# Allegro board RV1126_RV1109_Template_LP3S178P132SD6_V10_20200901.brd
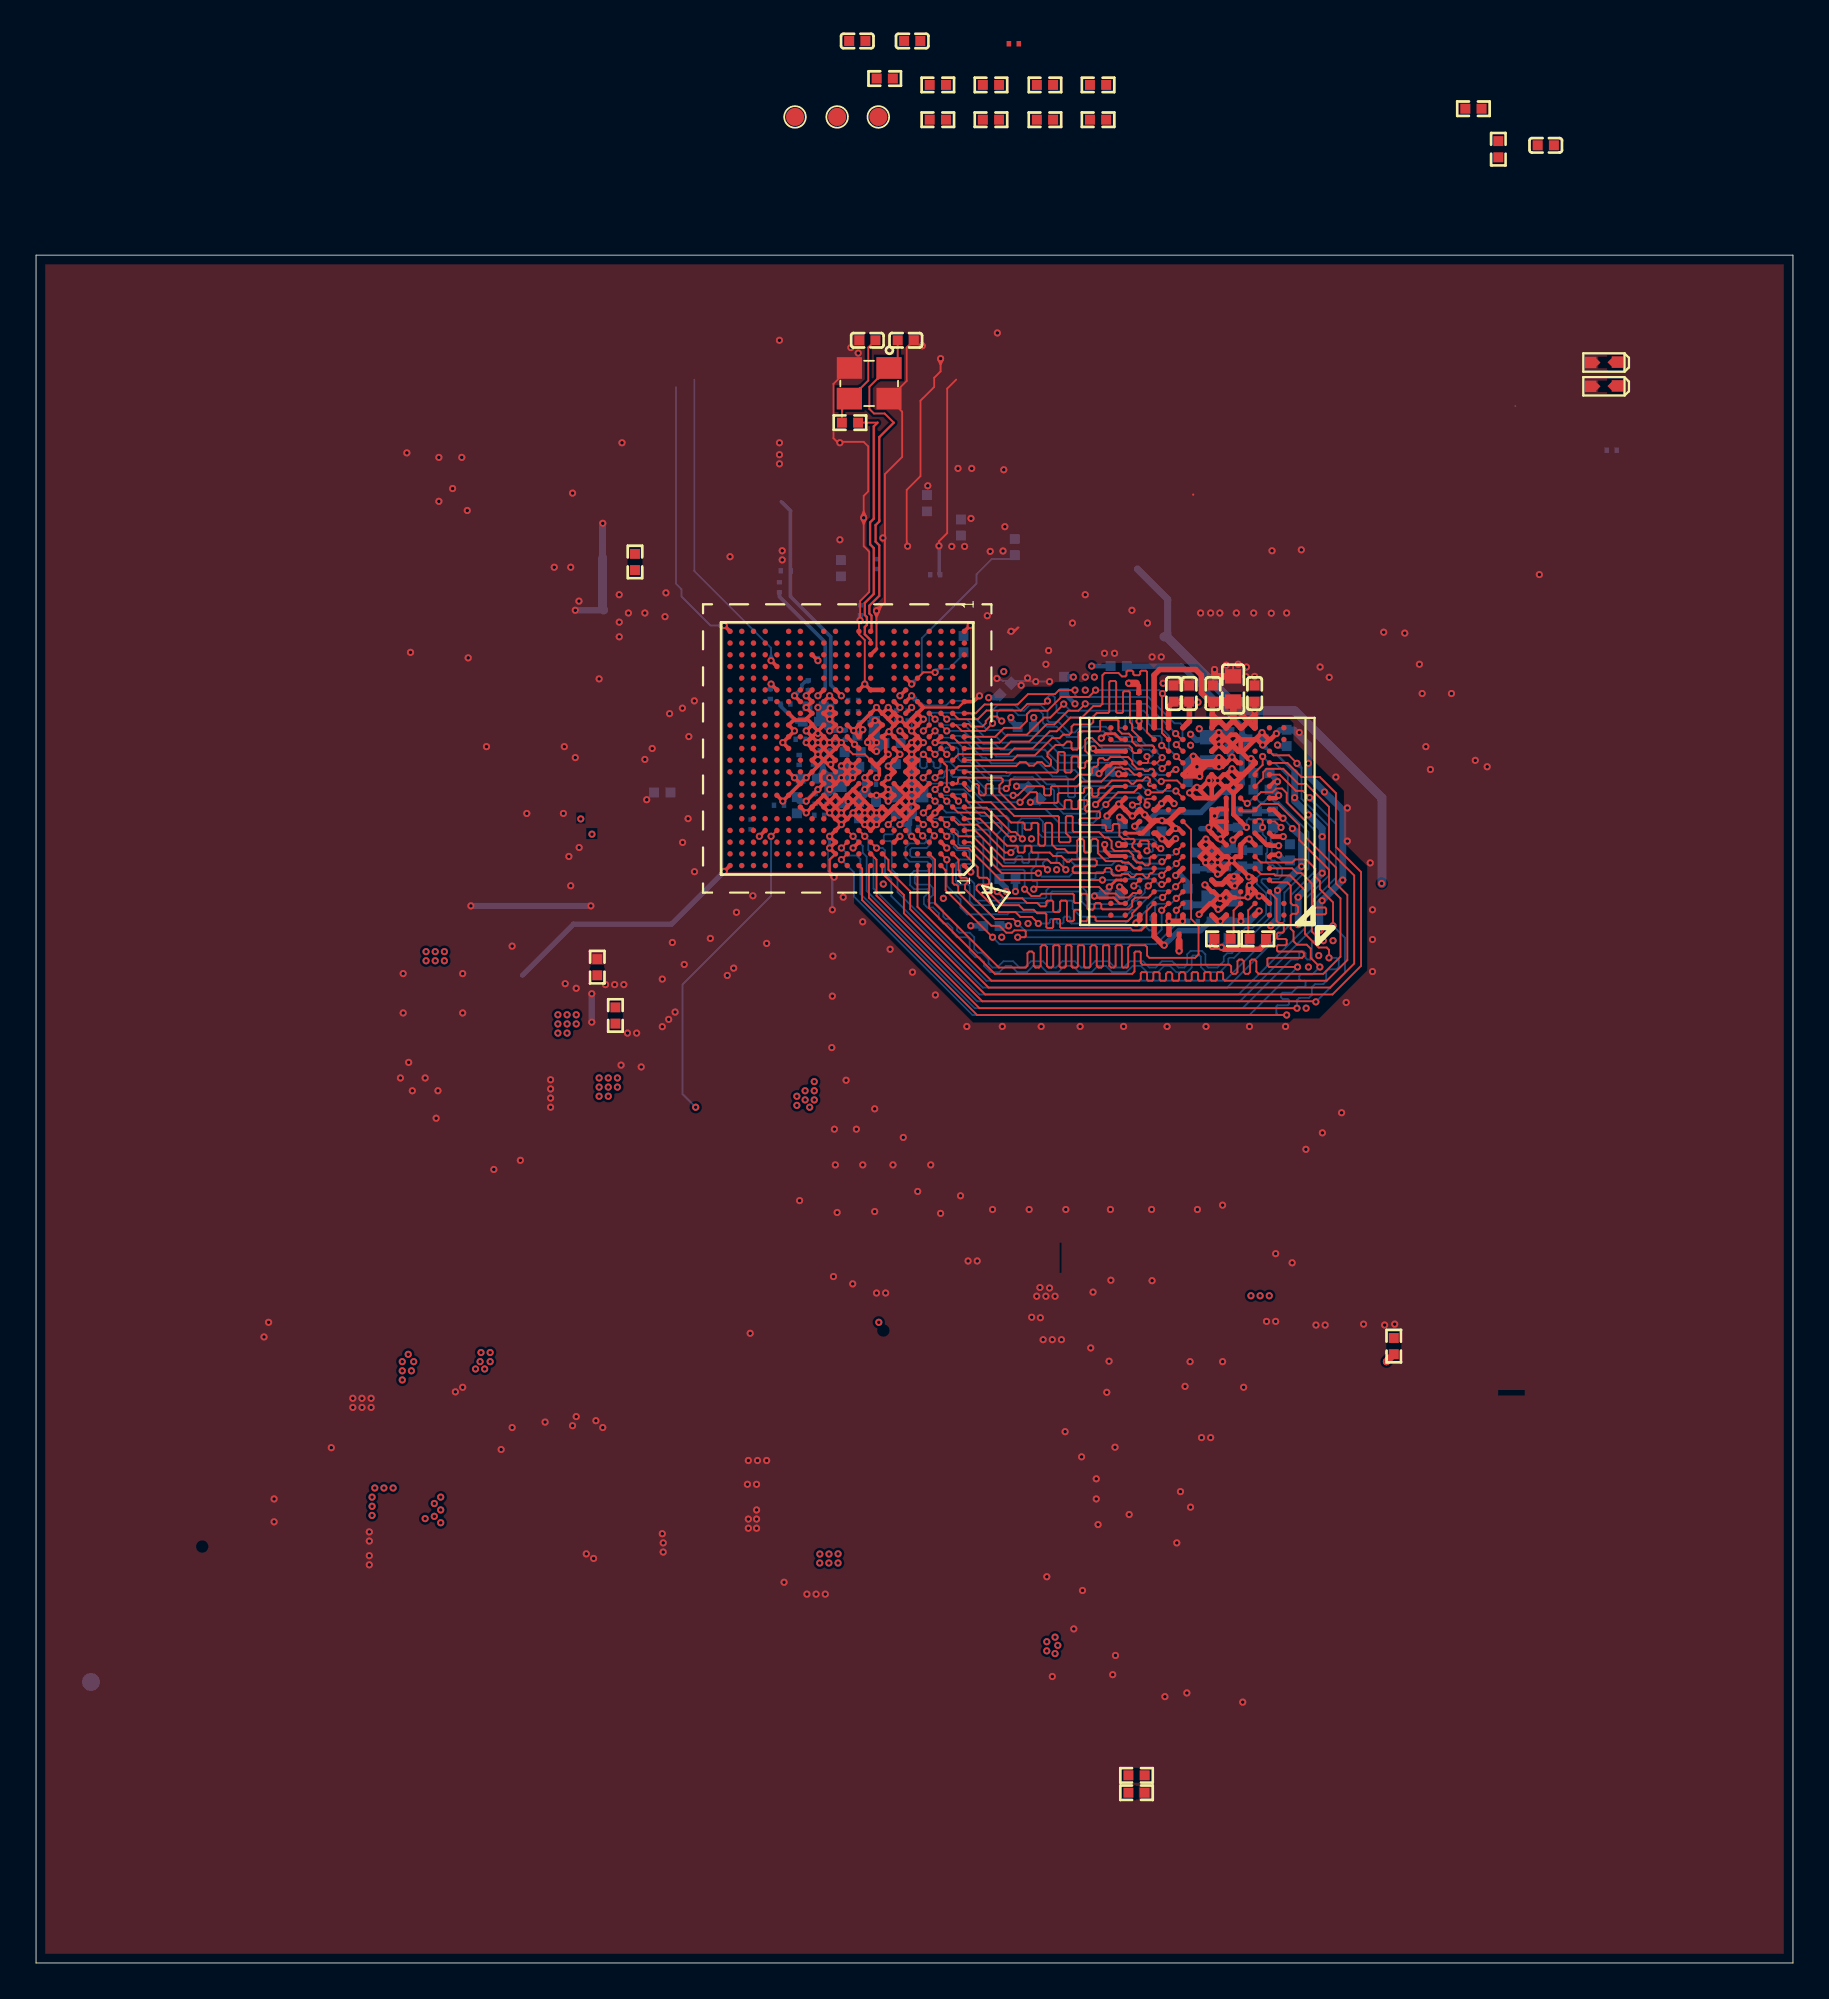
[diagram p0: board, top side]
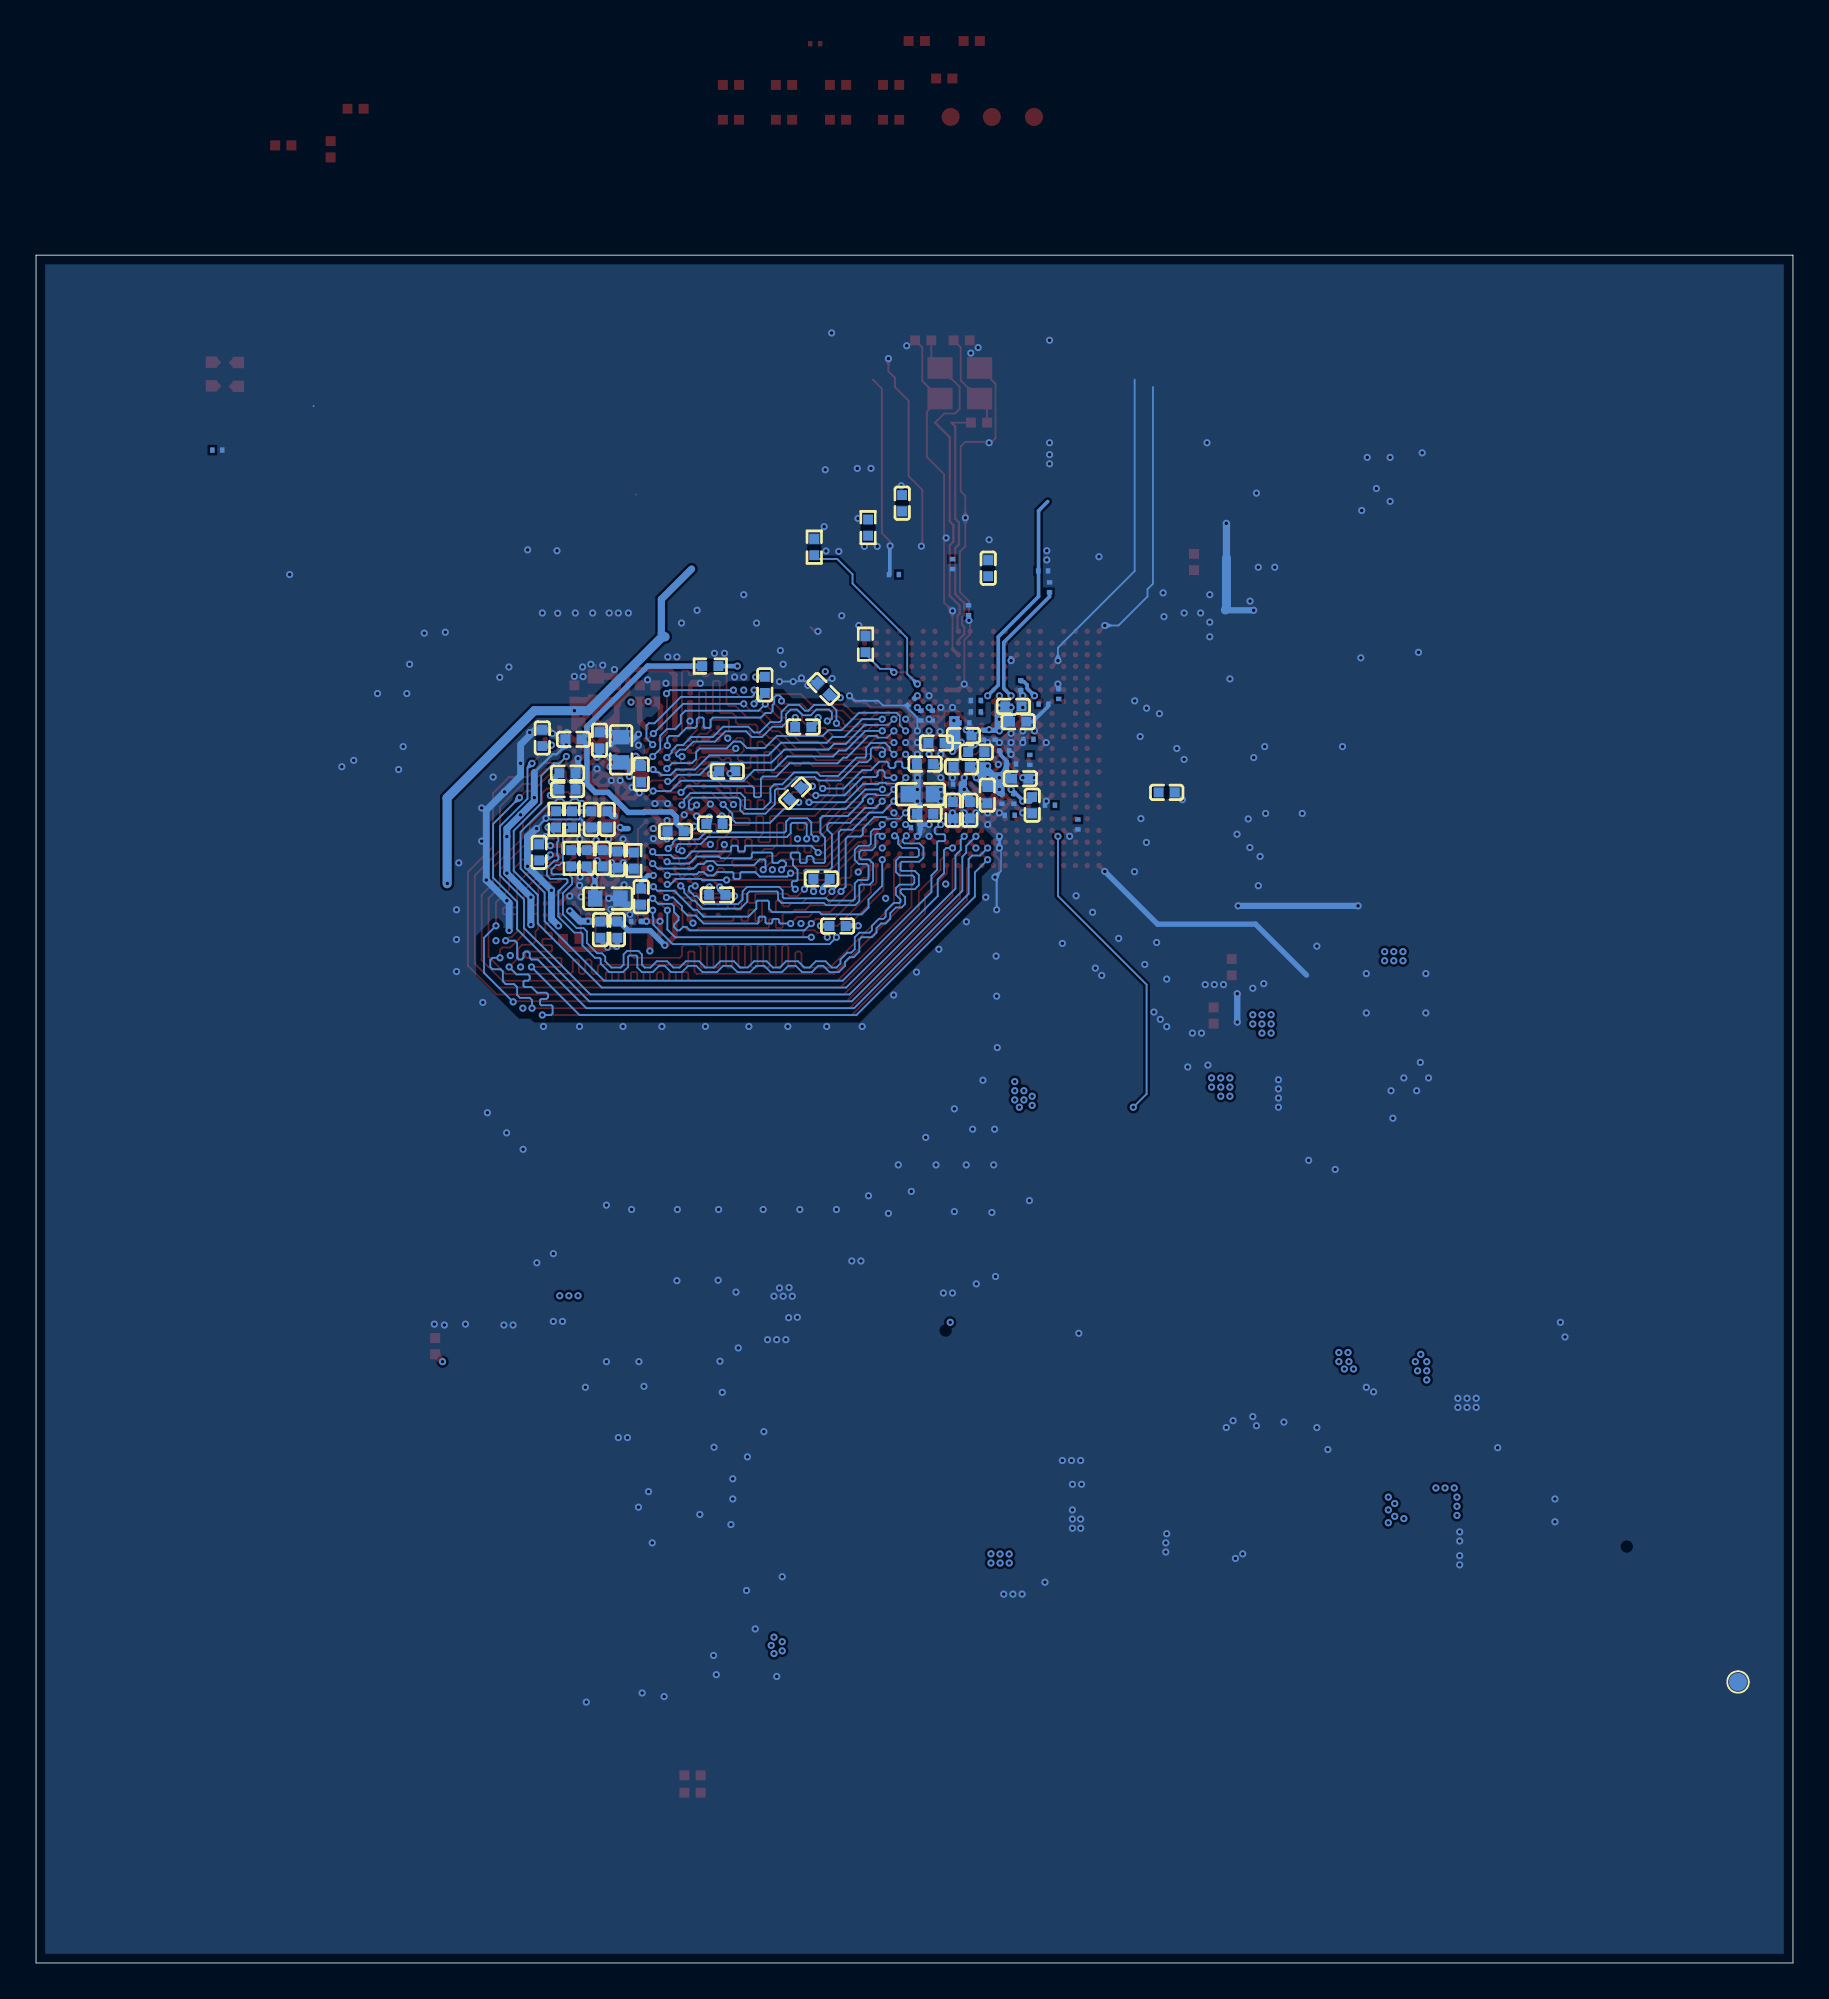
[diagram p1: board, bottom side, seen from below]

Outline 97.49 x 94.79 mm; copper layers: TOP, GND, POWER, S1, GND2, BOTTOM. Coordinates in mm from the lower left corner of the outline.
Outline path: 0,94.79 97.49,94.79 97.49,0 0,0 0,94.79

## Placement (name value [footprint] x y rotation side)
C1000  .10  [C0402]  34.75 64.97 180 bottom
C1001  .10  [C0201]  43.89 64.62 270 bottom
C1002  .10  [C0201]  43.38 66.55 180 bottom
C1003  .10  [C0201]  43.76 67.28 180 bottom
C1004  .10  [C0402]  46.13 66.4 0 bottom
C1005  .10  [C0402]  44.7 64.82 270 bottom
C1006  .10  [C0402]  42.88 65.74 180 bottom
C1007  .10  [C0201]  43.23 64.62 270 bottom
C1008  .10  [C0201]  46.33 65.43 0 bottom
C1009  .10  [C0402]  45.67 63.98 270 bottom
C1010  .10  [C0402]  45.31 67.21 180 bottom
C1011  .10  [C0402]  42.21 64.26 270 bottom
C1012  .10  [C0201]  44.91 68.17 270 bottom
C1013  .10  [C0201]  44.27 68.17 270 bottom
C1014  .10  [C0402]  42.99 68.89 180 bottom
C1015  .10  [C0402]  43.26 69.75 180 bottom
C1016  .10  [C0201]  45.97 68.83 180 bottom
C1017  .10  [C0201]  45.34 69.44 0 bottom
C1018  .10  [C0402]  47.52 67.72 0 bottom
C1019  .10  [C0402]  46.02 68.12 180 bottom
C1100  .10  [C0402]  46.13 90.07 180 top
C1101  .10  [C0402]  48.26 90.07 180 top
C1102  .10  [C0402]  48.62 106.68 0 top
C1103  .10  [C0201]  54.25 106.53 0 top
C1104  .10  [C0201]  46.63 77.65 90 bottom
C1105  .10  [C0402]  49.43 81.03 90 bottom
C1106  .10  [C0402]  45.57 106.68 0 top
C1107  .10  [C0201]  45.75 75.08 270 bottom
C1108  .10  [C0201]  49.89 77.06 0 bottom
C1200  .10  [C0201]  63.14 57.1 0 top
C1201  .10  [C0201]  64.19 57.81 0 bottom
C1202  .10  [C0201]  61.19 70.23 90 top
C1203  .10  [C0402]  46.61 63.98 270 bottom
C1204  .10  [C0402]  48.16 63.78 0 bottom
C1205  .10  [C0402]  48.16 66.55 0 bottom
C1206  .10  [C0603]  48.41 64.87 0 bottom
C1300  .10  [C0201]  41.25 76.35 90 bottom
C1301  .10  [C0201]  48.39 69.24 270 bottom
C1302  .10  [C0201]  43.46 63.7 0 bottom
C1400  .10  [C0201]  87.43 83.97 180 bottom
C1401  .10  [C0201]  47.75 69.24 270 bottom
C1402  .10  [C0201]  48.92 70 315 bottom
C1500  .10  [C0402]  44.65 77.42 90 bottom
C1501  .10  [C0201]  45.34 70.08 0 bottom
C1502  .10  [C0402]  83.77 100.89 180 top
C1600  .10  [C0201]  41.58 69.88 180 bottom
C1601  .10  [C0201]  42.42 67.92 0 bottom
C1602  .10  [C0201]  40.74 70.43 90 bottom
C1603  .10  [C0201]  42.85 70.92 270 bottom
C1700  .10  [C0201]  39.67 63.2 270 bottom
C1701  .10  [C0201]  41.22 64.26 0 bottom
C1702  .10  [C0201]  42.34 66.78 270 bottom
C1800  .10  [C0201]  41.61 77.27 180 bottom
C3101  .10  [C0603]  65.02 67.34 90 bottom
C3102  .10  [C0402]  55.37 64.92 135 bottom
C3103  .10  [C0402]  59.84 63.22 0 bottom
C3104  .10  [C0402]  66.22 67.87 90 bottom
C3105  .10  [C0402]  63.91 59.18 270 bottom
C3106  .10  [C0402]  68 65.13 180 bottom
C3107  .10  [C0402]  53.9 60.17 180 bottom
C3108  .10  [C0402]  53.01 57.56 180 bottom
C3109  .10  [C0603]  66.42 70.71 90 top
C3110  .10  [C0402]  65.3 70.46 90 top
C3111  .10  [C0402]  67.61 70.46 90 top
C3112  .10  [C0402]  65.23 57.35 270 bottom
C3113  .10  [C0402]  66.17 57.35 270 bottom
C3114  .10  [C0402]  66.93 61.32 90 bottom
C3116  .10  [C0402]  66.04 61.32 270 bottom
C3117  .10  [C0402]  65.23 61.24 270 bottom
C3118  .10  [C0402]  62 62.81 0 bottom
C3119  .10  [C0402]  67.67 67.92 0 bottom
C3120  .10  [C0603]  65.76 59.08 180 bottom
C3121  .10  [C0402]  63.91 65.99 270 bottom
C3122  .10  [C0402]  59.69 59.28 180 bottom
C3123  .10  [C0402]  63.98 70.46 90 top
C3124  .10  [C0402]  65.79 63.47 270 bottom
C3125  .10  [C0402]  69.39 68 90 bottom
C3126  .10  [C0402]  68 66.04 180 bottom
C3127  .10  [C0402]  63.12 70.46 90 top
C3128  .10  [C0402]  57.05 70.94 270 bottom
C3129  .10  [C0402]  53.8 70.71 45 bottom
C3130  .10  [C0402]  59.13 66.14 180 bottom
C3131  .10  [C0402]  54.91 68.61 180 bottom
C3132  .10  [C0402]  69.57 61.65 90 bottom
C3898  .10  [C0402]  66.67 63.47 270 bottom
D1700  .10  [ESD0402]  86.99 87.51 180 top
D1701  .10  [ESD0402]  86.99 88.83 180 top
R1100  .10  [R0402]  45.16 85.5 180 top
R1103  .10  [R0402]  50.04 102.31 0 top
R1104  .10  [R0402]  51.32 79.67 90 bottom
R1200  .10  [R0201]  48.67 63.02 180 bottom
R1300  .10  [R0402]  50.04 104.24 0 top
R1301  .10  [R0402]  75.34 34.24 270 top
R1304  .10  [R0402]  61.06 10.41 0 top
R1305  .10  [R0402]  61.06 9.45 0 top
R1400  .10  [R0402]  54.31 78.59 90 bottom
R1401  .10  [R0402]  51.46 73.2 90 bottom
R1500  .10  [R0402]  52.98 102.31 0 top
R1501  .10  [R0402]  31.14 55.27 270 top
R1503  .10  [R0402]  32.15 52.59 270 top
R1600  .10  [R0402]  81.14 100.67 90 top
R1601  .10  [R0402]  79.76 102.92 180 top
R1602  .10  [R0402]  33.23 77.76 90 top
R1603  .10  [R0402]  52.98 104.24 0 top
R1700  .10  [R0402]  55.98 102.31 0 top
R1702  .10  [R0402]  55.98 104.24 0 top
R1706  .10  [R0402]  58.93 102.31 0 top
R1707  .10  [R0402]  58.93 104.24 0 top
R3100  .10  [R0402]  67.79 56.85 0 top
R3101  .10  [R0402]  65.84 56.85 180 top
R3102  .10  [R0402]  67.74 63.47 90 bottom
R3103  .10  [R0402]  68.63 63.47 90 bottom
R3104  .10  [R0402]  67.79 61.32 90 bottom
R3106  .10  [R0402]  64.31 61.19 270 bottom
R3108  .10  [R0402]  60.07 71.98 0 bottom
R3109  .10  [R0402]  47.09 104.6 0 top
TP1000  VAL  [TP_1R00]  42.11 102.46 0 top
TP1700  VAL  [TP_1R00]  44.45 102.46 0 top
TP1701  VAL  [TP_1R00]  46.74 102.46 0 top
TP1702  VAL  [TP_1R00]  3.05 15.6 180 bottom
U1000  VAL  [BGA409_14R00X14R00X0R90]  45.01 67.41 90 top
U3100  VAL  [FBGA178_13R00X11R50X1R20]  64.44 63.36 180 top
Y1100  VAL  [CRY4_3R20X2R50X0R80]  46.23 87.68 180 top

## Library data of the parts
C1000 C1004-C1006 C1009-C1011 C1014 C1015 C1018 C1019 C1100-C1102 C1105 C1106 C1203-C1205 C1500 C1502 C3102-C3108 C3110-C3114 C3116-C3119 C3121-C3132 C3898 = C0402
C1001-C1003 C1007 C1008 C1012 C1013 C1016 C1017 C1103 C1104 C1107 C1108 C1200-C1202 C1300-C1302 C1400-C1402 C1501 C1600-C1603 C1700-C1702 C1800 = C0201
C1206 C3101 C3109 C3120 = C0603
D1700 D1701 = ESD0402
R1100 R1103 R1104 R1300 R1301 R1304 R1305 R1400 R1401 R1500 R1501 R1503 R1600-R1603 R1700 R1702 R1706 R1707 R3100-R3104 R3106 R3108 R3109 = R0402
R1200 = R0201
TP1000 TP1700-TP1702 = TP_1R00
U1000 = BGA409_14R00X14R00X0R90
U3100 = FBGA178_13R00X11R50X1R20
Y1100 = CRY4_3R20X2R50X0R80

## Footprints (pads in the part's own frame, mm; a bottom-side part is the same pattern mirrored in y, then rotated)
BGA409_14R00X14R00X0R90
  round 0.3 smd: A1(-6.5,-6.5) A2(-6.5,-5.85) A3(-6.5,-5.2) A4(-6.5,-4.55) A5(-6.5,-3.9) A6(-6.5,-3.25) A7(-6.5,-2.6) A8(-6.5,-1.95) A9(-6.5,-1.3) A10(-6.5,-0.65) A11(-6.5,0) A12(-6.5,0.65) A13(-6.5,1.3) A15(-6.5,2.6) A16(-6.5,3.25) A18(-6.5,4.55) A19(-6.5,5.2) A20(-6.5,5.85) A21(-6.5,6.5) AA1(6.5,-6.5) AA2(6.5,-5.85) AA3(6.5,-5.2) AA4(6.5,-4.55) AA6(6.5,-3.25) AA7(6.5,-2.6) AA9(6.5,-1.3) AA10(6.5,-0.65) AA12(6.5,0.65) AA13(6.5,1.3) AA15(6.5,2.6) AA16(6.5,3.25) AA18(6.5,4.55) AA19(6.5,5.2) AA20(6.5,5.85) AA21(6.5,6.5) B1(-5.85,-6.5) B2(-5.85,-5.85) B3(-5.85,-5.2) B4(-5.85,-4.55) B5(-5.85,-3.9) B6(-5.85,-3.25) B7(-5.85,-2.6) B8(-5.85,-1.95) B9(-5.85,-1.3) B10(-5.85,-0.65) B11(-5.85,0) B12(-5.85,0.65) B13(-5.85,1.3) B14(-5.85,1.95) B15(-5.85,2.6) B16(-5.85,3.25) B17(-5.85,3.9) B18(-5.85,4.55) B19(-5.85,5.2) B20(-5.85,5.85) B21(-5.85,6.5) C1(-5.2,-6.5) C2(-5.2,-5.85) C3(-5.2,-5.2) C4(-5.2,-4.55) C5(-5.2,-3.9) C6(-5.2,-3.25) C7(-5.2,-2.6) C8(-5.2,-1.95) C9(-5.2,-1.3) C10(-5.2,-0.65) C11(-5.2,0) C12(-5.2,0.65) C13(-5.2,1.3) C14(-5.2,1.95) C15(-5.2,2.6) C16(-5.2,3.25) C17(-5.2,3.9) C18(-5.2,4.55) C19(-5.2,5.2) C20(-5.2,5.85) C21(-5.2,6.5) D1(-4.55,-6.5) D2(-4.55,-5.85) D3(-4.55,-5.2) D4(-4.55,-4.55) D5(-4.55,-3.9) D6(-4.55,-3.25) D7(-4.55,-2.6) D8(-4.55,-1.95) D9(-4.55,-1.3) D10(-4.55,-0.65) D11(-4.55,0) D12(-4.55,0.65) D13(-4.55,1.3) D14(-4.55,1.95) D15(-4.55,2.6) D16(-4.55,3.25) D17(-4.55,3.9) D18(-4.55,4.55) D19(-4.55,5.2) D20(-4.55,5.85) D21(-4.55,6.5) E1(-3.9,-6.5) E2(-3.9,-5.85) E3(-3.9,-5.2) E4(-3.9,-4.55) E5(-3.9,-3.9) E6(-3.9,-3.25) E7(-3.9,-2.6) E8(-3.9,-1.95) E9(-3.9,-1.3) E10(-3.9,-0.65) E11(-3.9,0) E12(-3.9,0.65) E13(-3.9,1.3) E14(-3.9,1.95) E16(-3.9,3.25) E17(-3.9,3.9) E18(-3.9,4.55) E19(-3.9,5.2) E20(-3.9,5.85) F1(-3.25,-6.5) F2(-3.25,-5.85) F3(-3.25,-5.2) F4(-3.25,-4.55) F5(-3.25,-3.9) F6(-3.25,-3.25) F7(-3.25,-2.6) F8(-3.25,-1.95) F9(-3.25,-1.3) F10(-3.25,-0.65) F11(-3.25,0) F12(-3.25,0.65) F13(-3.25,1.3) F14(-3.25,1.95) F15(-3.25,2.6) F19(-3.25,5.2) F20(-3.25,5.85) F21(-3.25,6.5) G1(-2.6,-6.5) G2(-2.6,-5.85) G3(-2.6,-5.2) G4(-2.6,-4.55) G5(-2.6,-3.9) G6(-2.6,-3.25) G7(-2.6,-2.6) G8(-2.6,-1.95) G9(-2.6,-1.3) G10(-2.6,-0.65) G11(-2.6,0) G12(-2.6,0.65) G13(-2.6,1.3) G15(-2.6,2.6) G16(-2.6,3.25) G17(-2.6,3.9) G18(-2.6,4.55) G19(-2.6,5.2) G20(-2.6,5.85) G21(-2.6,6.5) H1(-1.95,-6.5) H2(-1.95,-5.85) H3(-1.95,-5.2) H4(-1.95,-4.55) H5(-1.95,-3.9) H6(-1.95,-3.25) H7(-1.95,-2.6) H8(-1.95,-1.95) H9(-1.95,-1.3) H10(-1.95,-0.65) H11(-1.95,0) H12(-1.95,0.65) H13(-1.95,1.3) H14(-1.95,1.95) H15(-1.95,2.6) H16(-1.95,3.25) H17(-1.95,3.9) H18(-1.95,4.55) H19(-1.95,5.2) H20(-1.95,5.85) J1(-1.3,-6.5) J2(-1.3,-5.85) J3(-1.3,-5.2) J4(-1.3,-4.55) J5(-1.3,-3.9) J6(-1.3,-3.25) J7(-1.3,-2.6) J9(-1.3,-1.3) J10(-1.3,-0.65) J11(-1.3,0) J12(-1.3,0.65) J13(-1.3,1.3) J14(-1.3,1.95) J15(-1.3,2.6) J16(-1.3,3.25) J17(-1.3,3.9) J18(-1.3,4.55) J19(-1.3,5.2) J20(-1.3,5.85) J21(-1.3,6.5) K1(-0.65,-6.5) K2(-0.65,-5.85) K3(-0.65,-5.2) K4(-0.65,-4.55) K5(-0.65,-3.9) K6(-0.65,-3.25) K7(-0.65,-2.6) K8(-0.65,-1.95) K9(-0.65,-1.3) K10(-0.65,-0.65) K11(-0.65,0) K12(-0.65,0.65) K13(-0.65,1.3) K14(-0.65,1.95) K15(-0.65,2.6) K16(-0.65,3.25) K17(-0.65,3.9) K18(-0.65,4.55) K19(-0.65,5.2) K20(-0.65,5.85) K21(-0.65,6.5) L1(0,-6.5) L2(0,-5.85) L3(0,-5.2) L4(0,-4.55) L5(0,-3.9) L6(0,-3.25) L7(0,-2.6) L9(0,-1.3) L10(0,-0.65) L11(0,0) L12(0,0.65) L13(0,1.3) L14(0,1.95) L16(0,3.25) L17(0,3.9) L19(0,5.2) L20(0,5.85) M1(0.65,-6.5) M2(0.65,-5.85) M3(0.65,-5.2) M4(0.65,-4.55) M5(0.65,-3.9) M6(0.65,-3.25) M7(0.65,-2.6) M8(0.65,-1.95) M9(0.65,-1.3) M10(0.65,-0.65) M11(0.65,0) M12(0.65,0.65) M13(0.65,1.3) M14(0.65,1.95) M15(0.65,2.6) M16(0.65,3.25) M17(0.65,3.9) M18(0.65,4.55) M19(0.65,5.2) M20(0.65,5.85) M21(0.65,6.5) N1(1.3,-6.5) N2(1.3,-5.85) N3(1.3,-5.2) N4(1.3,-4.55) N5(1.3,-3.9) N6(1.3,-3.25) N7(1.3,-2.6) N8(1.3,-1.95) N9(1.3,-1.3) N10(1.3,-0.65) N11(1.3,0) N12(1.3,0.65) N13(1.3,1.3) N14(1.3,1.95) N16(1.3,3.25) N17(1.3,3.9) N18(1.3,4.55) N19(1.3,5.2) N20(1.3,5.85) N21(1.3,6.5) P1(1.95,-6.5) P2(1.95,-5.85) P3(1.95,-5.2) P4(1.95,-4.55) P5(1.95,-3.9) P6(1.95,-3.25) P7(1.95,-2.6) P8(1.95,-1.95) P9(1.95,-1.3) P10(1.95,-0.65) P11(1.95,0) P12(1.95,0.65) P13(1.95,1.3) P14(1.95,1.95) P15(1.95,2.6) P16(1.95,3.25) P17(1.95,3.9) P19(1.95,5.2) P20(1.95,5.85) R1(2.6,-6.5) R2(2.6,-5.85) R3(2.6,-5.2) R4(2.6,-4.55) R5(2.6,-3.9) R6(2.6,-3.25) R7(2.6,-2.6) R8(2.6,-1.95) R9(2.6,-1.3) R10(2.6,-0.65) R11(2.6,0) R12(2.6,0.65) R13(2.6,1.3) R14(2.6,1.95) R15(2.6,2.6) R16(2.6,3.25) R17(2.6,3.9) R18(2.6,4.55) R19(2.6,5.2) R20(2.6,5.85) R21(2.6,6.5) T1(3.25,-6.5) T2(3.25,-5.85) T3(3.25,-5.2) T4(3.25,-4.55) T6(3.25,-3.25) T7(3.25,-2.6) T8(3.25,-1.95) T9(3.25,-1.3) T10(3.25,-0.65) T11(3.25,0) T12(3.25,0.65) T13(3.25,1.3) T14(3.25,1.95) T15(3.25,2.6) T16(3.25,3.25) T17(3.25,3.9) T18(3.25,4.55) T19(3.25,5.2) T20(3.25,5.85) T21(3.25,6.5) U2(3.9,-5.85) U3(3.9,-5.2) U4(3.9,-4.55) U5(3.9,-3.9) U6(3.9,-3.25) U7(3.9,-2.6) U9(3.9,-1.3) U11(3.9,0) U12(3.9,0.65) U13(3.9,1.3) U15(3.9,2.6) U16(3.9,3.25) U18(3.9,4.55) U19(3.9,5.2) U20(3.9,5.85) V1(4.55,-6.5) V2(4.55,-5.85) V3(4.55,-5.2) V4(4.55,-4.55) V5(4.55,-3.9) V6(4.55,-3.25) V7(4.55,-2.6) V9(4.55,-1.3) V11(4.55,0) V12(4.55,0.65) V13(4.55,1.3) V15(4.55,2.6) V16(4.55,3.25) V17(4.55,3.9) V18(4.55,4.55) V19(4.55,5.2) V20(4.55,5.85) V21(4.55,6.5) W1(5.2,-6.5) W2(5.2,-5.85) W3(5.2,-5.2) W4(5.2,-4.55) W5(5.2,-3.9) W6(5.2,-3.25) W7(5.2,-2.6) W8(5.2,-1.95) W9(5.2,-1.3) W10(5.2,-0.65) W11(5.2,0) W12(5.2,0.65) W13(5.2,1.3) W14(5.2,1.95) W15(5.2,2.6) W16(5.2,3.25) W17(5.2,3.9) W18(5.2,4.55) W19(5.2,5.2) W20(5.2,5.85) W21(5.2,6.5) Y1(5.85,-6.5) Y2(5.85,-5.85) Y3(5.85,-5.2) Y4(5.85,-4.55) Y5(5.85,-3.9) Y6(5.85,-3.25) Y7(5.85,-2.6) Y8(5.85,-1.95) Y9(5.85,-1.3) Y10(5.85,-0.65) Y11(5.85,0) Y12(5.85,0.65) Y13(5.85,1.3) Y14(5.85,1.95) Y15(5.85,2.6) Y16(5.85,3.25) Y17(5.85,3.9) Y18(5.85,4.55) Y19(5.85,5.2) Y20(5.85,5.85) Y21(5.85,6.5)
C0201
  rect 0.25x0.3 smd: 1(-0.275,0) 2(0.275,0)
C0402
  rect 0.55x0.55 smd: 1(-0.45,0) 2(0.45,0)
C0603
  rect 0.8x0.9 smd: 1(-0.7,0) 2(0.7,0)
CRY4_3R20X2R50X0R80
  rect 1.4x1.2 smd: 1(-1.1,-0.85) 2(1.1,-0.85) 3(1.1,0.85) 4(-1.1,0.85)
ESD0402
  custom 0.868x0.636 smd: 1(-0.635,-0.02)
  custom 0.86x0.636 smd: 2(0.622,0)
FBGA178_13R00X11R50X1R20
  round 0.3 smd: A1(-4.8,5.2) A2(-4,5.2) A3(-3.2,5.2) A4(-2.4,5.2) A5(-1.6,5.2) A6(-0.8,5.2) A8(0.8,5.2) A9(1.6,5.2) A10(2.4,5.2) A11(3.2,5.2) A12(4,5.2) A13(4.8,5.2) B1(-4.8,4.55) B2(-4,4.55) B3(-3.2,4.55) B4(-2.4,4.55) B5(-1.6,4.55) B6(-0.8,4.55) B8(0.8,4.55) B9(1.6,4.55) B10(2.4,4.55) B11(3.2,4.55) B12(4,4.55) B13(4.8,4.55) C2(-4,3.9) C3(-3.2,3.9) C4(-2.4,3.9) C5(-1.6,3.9) C6(-0.8,3.9) C8(0.8,3.9) C9(1.6,3.9) C10(2.4,3.9) C11(3.2,3.9) C12(4,3.9) D2(-4,3.25) D3(-3.2,3.25) D4(-2.4,3.25) D5(-1.6,3.25) D6(-0.8,3.25) D8(0.8,3.25) D9(1.6,3.25) D10(2.4,3.25) D11(3.2,3.25) D12(4,3.25) E2(-4,2.6) E3(-3.2,2.6) E4(-2.4,2.6) E5(-1.6,2.6) E6(-0.8,2.6) E8(0.8,2.6) E9(1.6,2.6) E10(2.4,2.6) E11(3.2,2.6) E12(4,2.6) F2(-4,1.95) F3(-3.2,1.95) F4(-2.4,1.95) F5(-1.6,1.95) F6(-0.8,1.95) F8(0.8,1.95) F9(1.6,1.95) F10(2.4,1.95) F11(3.2,1.95) F12(4,1.95) G2(-4,1.3) G3(-3.2,1.3) G4(-2.4,1.3) G5(-1.6,1.3) G6(-0.8,1.3) G8(0.8,1.3) G9(1.6,1.3) G10(2.4,1.3) G11(3.2,1.3) G12(4,1.3) H2(-4,0.65) H3(-3.2,0.65) H4(-2.4,0.65) H5(-1.6,0.65) H6(-0.8,0.65) H8(0.8,0.65) H9(1.6,0.65) H10(2.4,0.65) H11(3.2,0.65) H12(4,0.65) J2(-4,0) J3(-3.2,0) J4(-2.4,0) J5(-1.6,0) J6(-0.8,0) J8(0.8,0) J9(1.6,0) J10(2.4,0) J11(3.2,0) J12(4,0) K2(-4,-0.65) K3(-3.2,-0.65) K4(-2.4,-0.65) K5(-1.6,-0.65) K6(-0.8,-0.65) K8(0.8,-0.65) K9(1.6,-0.65) K10(2.4,-0.65) K11(3.2,-0.65) K12(4,-0.65) L2(-4,-1.3) L3(-3.2,-1.3) L4(-2.4,-1.3) L5(-1.6,-1.3) L6(-0.8,-1.3) L8(0.8,-1.3) L9(1.6,-1.3) L10(2.4,-1.3) L11(3.2,-1.3) L12(4,-1.3) M2(-4,-1.95) M3(-3.2,-1.95) M4(-2.4,-1.95) M5(-1.6,-1.95) M6(-0.8,-1.95) M8(0.8,-1.95) M9(1.6,-1.95) M10(2.4,-1.95) M11(3.2,-1.95) M12(4,-1.95) N2(-4,-2.6) N3(-3.2,-2.6) N4(-2.4,-2.6) N5(-1.6,-2.6) N6(-0.8,-2.6) N8(0.8,-2.6) N9(1.6,-2.6) N10(2.4,-2.6) N11(3.2,-2.6) N12(4,-2.6) P2(-4,-3.25) P3(-3.2,-3.25) P4(-2.4,-3.25) P5(-1.6,-3.25) P6(-0.8,-3.25) P8(0.8,-3.25) P9(1.6,-3.25) P10(2.4,-3.25) P11(3.2,-3.25) P12(4,-3.25) R2(-4,-3.9) R3(-3.2,-3.9) R4(-2.4,-3.9) R5(-1.6,-3.9) R6(-0.8,-3.9) R8(0.8,-3.9) R9(1.6,-3.9) R10(2.4,-3.9) R11(3.2,-3.9) R12(4,-3.9) T1(-4.8,-4.55) T2(-4,-4.55) T3(-3.2,-4.55) T4(-2.4,-4.55) T5(-1.6,-4.55) T6(-0.8,-4.55) T8(0.8,-4.55) T9(1.6,-4.55) T10(2.4,-4.55) T11(3.2,-4.55) T12(4,-4.55) T13(4.8,-4.55) U1(-4.8,-5.2) U2(-4,-5.2) U3(-3.2,-5.2) U4(-2.4,-5.2) U5(-1.6,-5.2) U6(-0.8,-5.2) U8(0.8,-5.2) U9(1.6,-5.2) U10(2.4,-5.2) U11(3.2,-5.2) U12(4,-5.2) U13(4.8,-5.2)
R0201
  rect 0.25x0.3 smd: 1(-0.275,0) 2(0.275,0)
R0402
  rect 0.55x0.55 smd: 1(-0.45,0) 2(0.45,0)
TP_1R00
  round 1 smd: 1(0,0)

## Nets
GND: C1000.2 C1001.2 C1002.2 C1003.2 C1004.2 C1005.2 C1006.2 C1007.2 C1008.2 C1009.2 C1010.2 C1011.2 C1012.2 C1013.2 C1014.2 C1015.2 C1016.2 C1017.2 C1018.2 C1019.2 C1100.2 C1101.1 C1102.1 C1103.1 C1104.1 C1105.1 C1106.1 C1107.1 C1108.2 C1200.2 C1201.2 C1202.2 C1203.2 C1204.2 C1205.2 C1206.2 C1300.2 C1301.2 C1302.2 C1400.2 C1401.2 C1402.2 C1500.2 C1501.2 C1502.2 C1600.2 C1601.2 C1602.2 C1603.2 C1700.2 C1701.2 C1702.2 C1800.2 C3101.2 C3102.2 C3103.2 C3104.2 C3105.2 C3106.2 C3107.2 C3108.2 C3109.2 C3110.2 C3111.2 C3112.2 C3113.2 C3116.2 C3117.2 C3118.2 C3119.2 C3120.2 C3121.2 C3122.2 C3123.2 C3124.2 C3125.2 C3126.2 C3127.2 C3128.2 C3129.2 C3130.2 C3131.2 C3132.2 C3898.2 D1700.2 D1701.2 R1200.2 R1305.2 R1400.2 R1401.2 R1501.1 R3100.2 R3101.2 R3106.2 TP1702.1 U1000.A1 U1000.A21 U1000.AA1 U1000.AA10 U1000.AA21 U1000.B12 U1000.C3 U1000.C5 U1000.C7 U1000.C10 U1000.C12 U1000.D9 U1000.D12 U1000.D18 U1000.E4 U1000.E6 U1000.E8 U1000.E9 U1000.E10 U1000.E11 U1000.E12 U1000.F3 U1000.F5 U1000.F6 U1000.F7 U1000.F8 U1000.F9 U1000.F10 U1000.F11 U1000.F12 U1000.F13 U1000.F14 U1000.F15 U1000.G2 U1000.G5 U1000.G6 U1000.G10 U1000.G11 U1000.G12 U1000.G13 U1000.G16 U1000.G17 U1000.H4 U1000.H5 U1000.H6 U1000.H7 U1000.H10 U1000.H15 U1000.J5 U1000.J6 U1000.J12 U1000.J14 U1000.J16 U1000.K5 U1000.K6 U1000.K8 U1000.K9 U1000.K12 U1000.K13 U1000.K14 U1000.L2 U1000.L5 U1000.L6 U1000.L11 U1000.L12 U1000.L13 U1000.L14 U1000.L16 U1000.M3 U1000.M5 U1000.M7 U1000.M8 U1000.M10 U1000.M12 U1000.M13 U1000.M14 U1000.M16 U1000.N5 U1000.N6 U1000.N7 U1000.N10 U1000.N11 U1000.N13 U1000.N14 U1000.N16 U1000.P5 U1000.P7 U1000.P8 U1000.P9 U1000.P14 U1000.P16 U1000.R1 U1000.R5 U1000.R12 U1000.R13 U1000.R14 U1000.T6 U1000.T8 U1000.T9 U1000.T10 U1000.T14 U1000.T17 U1000.V17 U1000.W9 U1000.W14 U3100.B2 U3100.B5 U3100.B6 U3100.B12 U3100.C3 U3100.C5 U3100.C6 U3100.D3 U3100.D12 U3100.E4 U3100.E5 U3100.E6 U3100.F4 U3100.F5 U3100.F6 U3100.F12 U3100.G3 U3100.G4 U3100.G6 U3100.G9 U3100.H2 U3100.H10 U3100.J4 U3100.J12 U3100.K2 U3100.K10 U3100.L6 U3100.L9 U3100.M4 U3100.M5 U3100.M6 U3100.M12 U3100.N4 U3100.N5 U3100.N6 U3100.P3 U3100.P12 U3100.R4 U3100.R5 U3100.R6 U3100.T2 U3100.T3 U3100.T4 U3100.T5 U3100.T6 U3100.T12 Y1100.2 Y1100.4
VCC0V8_PMU: C1102.2 C1103.2 U1000.P10 U1000.P11
VCC1V8_DDR: C3109.1 C3110.1 C3111.1 C3112.1 C3113.1 R3109.2 U3100.A3 U3100.A4 U3100.A5 U3100.A6 U3100.A10 U3100.U3 U3100.U4 U3100.U5 U3100.U6 U3100.U10
VCC1V8_PMU: C1000.1 C1104.2 C1105.2 C1107.2 C1302.1 R3109.1 U1000.E14 U1000.H14 U1000.R9 U1000.R10 U1000.R11
VCC3V3_SYS: C1108.1 C1700.1 R1304.1 U1000.J15 U1000.K15 U1000.R8
VCC_0V8: C1402.1 R1603.1 R1706.1 U1000.R6
VCC_1V8: C1401.1 C1501.1 C1602.1 C1800.1 R1300.2 R1500.2 R1503.2 R1600.1 R1602.1 R1707.1 U1000.E16 U1000.P15 U1000.R7 U1000.T12
VCC_3V3: C1400.1 R1301.2 R1601.1 U1000.T7
VCC_DDR: C1200.1 C1201.1 C1202.1 C1203.1 C1204.1 C1205.1 C1206.1 C3101.1 C3102.1 C3103.1 C3104.1 C3105.1 C3106.1 C3107.1 C3108.1 C3114.1 C3120.1 C3121.1 C3122.1 C3123.1 C3124.1 C3125.1 C3126.1 C3127.1 C3128.1 C3129.1 C3130.1 C3131.1 C3132.1 R3104.1 U1000.G7 U1000.G8 U1000.G9 U1000.H8 U1000.J7 U1000.K7 U1000.L7 U3100.A8 U3100.A9 U3100.A11 U3100.C12 U3100.D4 U3100.D5 U3100.D6 U3100.E8 U3100.E12 U3100.F2 U3100.G2 U3100.G5 U3100.G12 U3100.H3 U3100.H5 U3100.H6 U3100.H8 U3100.H9 U3100.H11 U3100.H12 U3100.J5 U3100.J6 U3100.J9 U3100.J10 U3100.K5 U3100.K6 U3100.K8 U3100.K11 U3100.K12 U3100.L2 U3100.L5 U3100.L12 U3100.M2 U3100.N8 U3100.N12 U3100.P4 U3100.P5 U3100.P6 U3100.R12 U3100.U8 U3100.U9 U3100.U11
VCCIO6_VDD: C1600.1 R1600.2 R1601.2 U1000.M15
VCCIO_FLASH: C1301.1 R1300.1 R1301.1 U1000.P6
VCCIO_SD: C1300.1 U1000.T13
VDD_ARM: C1012.1 C1013.1 C1014.1 C1015.1 U1000.N12 U1000.P12 U1000.P13
VDD_LOGIC: C1007.1 C1008.1 C1009.1 C1010.1 C1011.1 U1000.H9 U1000.H13 U1000.J9 U1000.J13 U1000.L10 U1000.M11
VDD_NPU: C1001.1 C1002.1 C1003.1 C1004.1 C1005.1 C1006.1 U1000.H11 U1000.H12 U1000.J10 U1000.J11 U1000.K10 U1000.K11
VDD_VEPU: C1016.1 C1017.1 C1018.1 C1019.1 U1000.L9 U1000.M9 U1000.N8 U1000.N9
32KCLK: R1104.1 U1000.AA3
ADKEY_IN0: C1500.1 R1503.1 U1000.E17
BOM_ID: C1502.1 R1500.1 R1501.2 U1000.D17
DDR3_A0: U1000.D10 U3100.R2
DDR3_A1: U1000.A8 U3100.P2
DDR3_A2: U1000.D11 U3100.N2
DDR3_A3: U1000.C9 U3100.N3
DDR3_A4: U1000.B8 U3100.M3
DDR3_A5: U1000.B9 U3100.F3
DDR3_A6: U1000.A9 U3100.E3
DDR3_A7: U1000.C11 U3100.E2
DDR3_A8: U1000.A10 U3100.D2
DDR3_A9: U1000.B11 U3100.C2
DDR3_CKE: U1000.A4 U3100.K3 U3100.K4
DDR3_CLKN: R3103.1 U1000.D5 U3100.J2
DDR3_CLKP: R3102.1 U1000.D4 U3100.J3
DDR3_CS0N: U1000.A5 U3100.L3
DDR3_CS1N: U1000.E7 U3100.L4
DDR3_ODT0: U1000.B4 U3100.J8
DDR_D0: U1000.K4 U3100.N10
DDR_D1: U1000.J4 U3100.M10
DDR_D2: U1000.P4 U3100.M8
DDR_D3: U1000.N4 U3100.P9
DDR_D4: U1000.J3 U3100.N11
DDR_D5: U1000.K3 U3100.M11
DDR_D6: U1000.M4 U3100.M9
DDR_D7: U1000.P3 U3100.N9
DDR_D8: U1000.D2 U3100.F9
DDR_D9: U1000.D1 U3100.F8
DDR_D10: U1000.H2 U3100.F11
DDR_D11: U1000.H1 U3100.F10
DDR_D12: U1000.G1 U3100.E11
DDR_D13: U1000.E1 U3100.E10
DDR_D14: U1000.C1 U3100.E9
DDR_D15: U1000.C2 U3100.D9
DDR_D16: U1000.K1 U3100.T11
DDR_D17: U1000.K2 U3100.T10
DDR_D18: U1000.J1 U3100.R11
DDR_D19: U1000.J2 U3100.R10
DDR_D20: U1000.P2 U3100.R9
DDR_D21: U1000.L1 U3100.T8
DDR_D22: U1000.M1 U3100.T9
DDR_D23: U1000.P1 U3100.R8
DDR_D24: U1000.A2 U3100.B9
DDR_D25: U1000.A3 U3100.B8
DDR_D26: U1000.G4 U3100.B11
DDR_D27: U1000.F4 U3100.B10
DDR_D28: U1000.H3 U3100.C11
DDR_D29: U1000.G3 U3100.C10
DDR_D30: U1000.B1 U3100.C9
DDR_D31: U1000.B2 U3100.C8
DDR_DM0: U1000.N3 U3100.L8
DDR_DM1: U1000.E2 U3100.G8
DDR_DM2: U1000.M2 U3100.P8
DDR_DM3: U1000.B3 U3100.D8
DDR_DQS0N: U1000.L3 U3100.L11
DDR_DQS0P: U1000.L4 U3100.L10
DDR_DQS1N: U1000.F1 U3100.G11
DDR_DQS1P: U1000.F2 U3100.G10
DDR_DQS2N: U1000.N1 U3100.P11
DDR_DQS2P: U1000.N2 U3100.P10
DDR_DQS3N: U1000.E3 U3100.D11
DDR_DQS3P: U1000.D3 U3100.D10
DEBUG_RX: D1701.1 R1702.2 TP1701.1
DEBUG_TX: D1700.1 R1700.2 TP1700.1
FLASH_VOL_SEL: R1304.2 R1305.1 U1000.Y8
MIPI_CSI_AVDD_0V8: C1603.1 R1603.2 U1000.R15 U1000.T15
MIPI_CSI_AVDD_1V8: C1601.1 R1602.2 U1000.R16 U1000.T16
MIPI_DSI_TX_AVDD_0V8: C1701.1 R1706.2 U1000.E18
MIPI_DSI_TX_AVDD_1V8: C1702.1 R1707.2 U1000.G15
RESET: C1106.2 R1103.2 U1000.W7
TSADC_SHUT: R1103.1 U1000.Y5
UART2_RX: R1702.1 U1000.H16
UART2_TX: R1700.1 U1000.G18
VREF_DDR: R3108.1 U1000.M6
VREFCA_DDR: C3114.2 C3116.1 C3117.1 R3104.2 R3106.1 U3100.H4
VREFDQ_DDR: C3118.1 C3119.1 R3108.2 U3100.J11
N18756046: R1401.1 U1000.U5
N19359535: C3898.1 R3102.2 R3103.2
N19361258: R3101.1 U3100.B4
N19361260: R3100.1 U3100.B3
N20336207: R1200.1 U1000.E5
N20475602: C1100.1 R1100.2 Y1100.3
N20475604: R1100.1 U1000.Y9
N20475620: C1101.2 U1000.AA9 Y1100.1
N20476715: TP1000.1 U1000.W6
N20478383: R1400.1 U1000.U6

Pads without a net: R1104 2; U1000 A6 A7 A11 A12 A13 A15 A16 A18 A19 A20 AA2 AA4 AA6 AA7 AA12 AA13 AA15 AA16 AA18 AA19 AA20 B5 B6 B7 B10 B13 B14 B15 B16 B17 B18 B19 B20 B21 C4 C6 C8 C13 C14 C15 C16 C17 C18 C19 C20 C21 D6 D7 D8 D13 D14 D15 D16 D19 D20 D21 E13 E19 E20 F19 F20 F21 G19 G20 G21 H17 H18 H19 H20 J17 J18 J19 J20 J21 K16 K17 K18 K19 K20 K21 L17 L19 L20 M17 M18 M19 M20 M21 N17 N18 N19 N20 N21 P17 P19 P20 R2 R3 R4 R17 R18 R19 R20 R21 T1 T2 T3 T4 T11 T18 T19 T20 T21 U2 U3 U4 U7 U9 U11 U12 U13 U15 U16 U18 U19 U20 V1 V2 V3 V4 V5 V6 V7 V9 V11 V12 V13 V15 V16 V18 V19 V20 V21 W1 W2 W3 W4 W5 W8 W10 W11 W12 W13 W15 W16 W17 W18 W19 W20 W21 Y1 Y2 Y3 Y4 Y6 Y7 Y10 Y11 Y12 Y13 Y14 Y15 Y16 Y17 Y18 Y19 Y20 Y21; U3100 A1 A2 A12 A13 B1 B13 C4 K9 R3 T1 T13 U1 U2 U12 U13

## Via types
v1: diameter 0.4, hole 0.2, TOP to BOTTOM, 709 vias

## Routing (per net, layer and track width the routed paths; a pad name or vN(x,y) marks a point on that pad's centre or on a via; arc(x,y) is an arc through that point)
GND: length 411.2
  TOP w0.08: C3111.2 v1(67.61,71.41) ; 65.39,71.41 65.3,71.32 C3110.2 ; C3127.2 63.24,70.91 v1(63.55,71.22) 63.86,70.91 C3123.2
  TOP w0.102: U1000.L11 45.33,67.09 45.98,67.09 U1000.K9 ; v1(66.7,72.09) 66.42,72.03 C3109.2 ; 51.05,87.88 50.56,87.39 50.56,79.37 50.1,78.91 v1(50.1,78.66) ; 58.8,59.13 v1(58.73,59.22) ; C1101.1 48.31,89.67 48.31,87.81 Y1100.4 48.06,86.1 48.06,83.59 47.1,82.64 47.1,75.52 v1(46.63,75.05) 46.63,72.94 ; Y1100.2 44.25,87.65 44.25,84.63 44.45,84.43 45.92,84.43 46.18,84.18 46.18,81.69 45.92,81.43 v1(45.92,80.21) 45.92,78.64 46.23,78.33 46.23,76.1 45.72,75.59 v1(45.72,74.52) 45.66,74.56 U1000.AA10 45.66,73.75 45.98,73.42 v1(45.98,70.99) ; v1(50.19,89.05) 50.19,88.34 49.83,87.99 49.83,87.48 49.07,86.72 49.07,82.53 48.31,81.77 48.31,78.89 v1(48.36,78.64) ; U1000.M7 47.61,68.06
  TOP w0.127: 49.23,69.69 51.18,69.69 U1000.R1 ; 49.23,69.69 49.23,69.68 ; 49.23,69.69 49.23,69.7 ; 44.03,67.09 U1000.L13 ; 44.03,67.09 U1000.L12 ; 44.03,67.09 U1000.K13 ; U1000.L2 50.53,67.74 v1(49.88,67.74) ; 44.36,62.21 U1000.C12 44.36,62.21 ; 44.36,61.56 U1000.B12 44.03,61.24 44.03,60.58 v1(44.28,60.27) ; 58.8,59.13 59.8,59.13 60.12,58.81 U3100.B12 ; 47.92,69.05 47.93,69.04 v1(47.93,69.04) ; 44.36,62.86 U1000.D12 ; v1(67.24,59.17) 67.19,59.12 66.56,59.12 66.54,59.14
  TOP w0.14: 59.35,68.23 59.86,68.23
  TOP w0.152: U3100.M12 59.8,65.31 v1(58.79,64.3) ; v1(59.55,59.73) 59.93,60.11 60.21,60.11 U3100.D12 ; 59.86,68.23 60.19,67.91 U3100.T12 ; v1(59.11,67.98) 59.35,68.23
  TOP w0.2: 48.58,64.49 U1000.F5 48.58,63.84 ; 48.58,64.49 49.23,65.14 U1000.H4 ; 48.58,64.49 U1000.F6 ; 42.77,69.07 U1000.P14 v1(42.73,69.69) U1000.R14 v1(42.73,70.34) U1000.T14 ; 42.77,69.07 42.68,68.99 42.13,68.99 42.08,69.04 ; 42.77,69.07 43.06,68.77 U1000.N14 ; U1000.P16 42.08,69.04 ; 42.08,69.04 U1000.N16 v1(42.08,68.39) U1000.M16 v1(41.43,67.74) U1000.L16 ; U1000.R13 v1(44.03,70.34) U1000.R12 ; U1000.J12 U1000.K13 ; U1000.K13 43.38,66.44 ; U1000.K13 U1000.L14 ; U1000.K13 v1(44.68,67.74) ; 47.93,64.49 U1000.F6 ; 47.93,64.49 U1000.F7 ; 47.93,64.49 U1000.G6 ; U1000.F6 48.58,63.84 ; U1000.AA21 v1(38.18,74.24) ; U1000.M7 U1000.L6 v1(48.58,67.09) ; 46.26,64.21 46.31,64.16 U1000.F9 ; 46.26,64.21 46.26,64.21 U1000.F9 ; 46.26,64.21 45.98,64.49 ; U1000.G5 48.58,65.13 v1(48.58,65.14) 48.56,65.12 48.26,64.81 U1000.G6 ; U1000.C7 v1(47.93,62.54) ; U1000.F10 45.98,64.49 ; U1000.F10 v1(45.98,63.84) U1000.E9 v1(46.63,63.19) ; U1000.F10 U1000.E11 v1(44.68,63.19) v1(44.03,63.84) ; U1000.F10 U1000.G11 ; 45.98,64.49 45.66,64.81 U1000.G10 U1000.F11 v1(44.68,63.84) U1000.E12 ; U1000.R1 52,70.01 v1(52.35,70.33) ; 43.38,66.44 U1000.K14 ; 43.38,66.44 U1000.J14 v1(42.73,65.79) U1000.H15 ; v1(43.38,72.29) U1000.W14 ; 48.26,63.51 U1000.E6 ; 48.26,63.51 v1(47.93,63.19) ; 48.26,63.51 48.58,63.84 ; U1000.A21 v1(38.18,60.59) ; v1(46.63,65.79) 46.79,65.94 46.79,66.28 46.63,66.44 ; v1(40.78,72.29) U1000.V17 ; U1000.C5 v1(48.58,62.54) ; v1(44.03,63.84) 43.38,64.49 ; v1(44.03,63.84) U1000.F12 44.36,64.16 U1000.G13 43.38,64.49 ; 43.38,64.49 43.06,64.16 U1000.F14 v1(42.73,63.84) 42.41,64.16 U1000.F15 ; U1000.J16 U1000.H15 ; U1000.H15 U1000.G16 v1(41.43,64.49) ; v1(47.33,68.34) U1000.M8 47.14,67.88 47.14,67.23 v1(47.28,67.09) ; v1(47.33,68.34) 47.61,68.71 ; v1(47.33,68.34) 47.61,68.06 ; U1000.W9 46.63,72.94 ; v1(46.63,63.19) U1000.E8 46.31,64.16 U1000.F9 ; v1(46.63,63.19) U1000.D9 v1(45.98,63.19) U1000.F8 ; v1(47.93,69.04) 48.58,68.39 48.91,68.06 U1000.M5 v1(49.23,67.74) v1(48.58,67.09) ; U1000.H7 47.93,65.14 ; 47.93,65.14 U1000.G6 ; 47.93,65.14 U1000.H6 ; U1000.N10 U1000.P9 v1(46.63,69.69) U1000.P8 ; U1000.N10 v1(45.36,68.4) ; U1000.N10 v1(45.87,68.45) U1000.M10 v1(45.36,68.4) ; U1000.F3 v1(49.88,63.84) ; U1000.N11 v1(45.36,68.4) ; U1000.T9 v1(45.98,70.99) U1000.T10 45.66,70.66 ; U1000.M3 v1(49.88,67.74) ; U1000.P8 v1(47.28,69.69) U1000.P7 ; U1000.P8 47.28,69.04 47.61,68.71 U1000.N7 ; U1000.K5 v1(48.58,67.09) ; U1000.L14 v1(42.73,67.74) ; U1000.L14 U1000.M13 ; v1(40.13,62.54) U1000.D18 ; v1(40.78,70.99) U1000.T17 ; U1000.N14 U1000.M13 ; U1000.N14 v1(42.73,68.39) 44.03,67.09 U1000.K12 v1(44.09,66.52) ; U1000.M13 U1000.L12 ; 48.58,69.04 48.91,68.71 U1000.N5 v1(49.23,69.04) U1000.P5 ; U1000.E4 v1(49.88,63.19) ; U1000.T6 v1(47.93,70.34) ; U1000.AA1 v1(51.83,74.24) ; U1000.L5 v1(48.58,67.74) ; 44.68,64.49 44.36,64.81 U1000.G12 43.71,64.16 U1000.F13 ; U1000.M14 U1000.N13 ; U1000.G2 v1(51.18,64.49) ; U1000.C3 v1(50.53,61.89)
  TOP w0.203: 48.91,69.36 49.23,69.68 ; 47.31,69.06 47.31,69.06 ; 47.31,69.06 47.28,69.04 ; 47.31,69.06 U1000.P7 ; U3100.P12 59.73,66.61 59.58,66.46 59.42,66.46 v1(58.98,66.01) ; 44.36,64.16 45.01,63.51 U1000.E11 ; 44.36,64.16 45.33,65.14 U1000.H10 ; 44.36,64.16 U1000.F12 ; 44.36,62.86 v1(44.03,62.53) 44.36,62.21 ; U1000.H5 48.56,65.12 ; v1(59.3,62.08) 59.3,61.76 59.61,61.44 60.4,61.44 U3100.F12 ; 49.23,69.7 U1000.R5 ; U1000.A1 v1(51.87,60.55) ; 44.36,61.56 v1(44.03,61.88) 44.36,62.21 ; U1000.G17 v1(41.43,64.49) ; U1000.N5 48.58,68.39 ; U1000.K14 v1(43.38,67.09) U1000.L13 U1000.M12 v1(44.68,67.74) U1000.L11 ; U1000.C10 v1(45.33,61.89) ; U1000.D12 v1(44.68,63.19) ; U1000.N6 48.58,69.04
  TOP w0.25: U1000.H6 48.91,66.11 U1000.J5 ; 47.92,69.05 U1000.P7
  TOP w0.254: U3100.T3 66.99,67.26 U3100.R4 ; U3100.T3 U3100.T4 ; U3100.T3 67.64,67.91 ; 66.38,67.6 66.69,67.91 U3100.T4 ; v1(64.9,61.07) 64.57,61.39 64.91,61.73 ; v1(64.9,61.07) 65.21,60.76 U3100.E6 ; v1(64.9,61.07) 64.9,61.07 U3100.F6 ; U3100.T5 66.3,68.17 66.57,68.17 U3100.T4 ; U3100.F6 65.53,61.7 65.53,61.77 ; U3100.F6 v1(65.56,61.08) ; U3100.F6 65.24,61.41 64.91,61.73 ; 63.42,56.74 63.42,57.09 C1200.2 ; 67.64,67.91 67.75,67.91 v1(68.06,67.6) 68.13,67.6 U3100.T2 ; 67.64,67.91 v1(68.03,68.3) 68.41,67.91 U3100.T2 ; 66.44,65.56 66.19,65.31 U3100.M5 ; 66.44,65.56 66.69,65.31 U3100.M4 66.44,64.91 ; 66.44,65.56 U3100.N5 ; v1(65.56,61.08) 65.89,60.76 U3100.E5 ; v1(65.56,61.08) 65.89,61.41 ; v1(65.56,61.08) U3100.E6 ; v1(65.71,59.09) 65.34,59.46 U3100.C6 65.24,59.46 v1(64.86,59.84) ; v1(65.71,59.09) 65.52,59.09 U3100.B6 ; v1(65.71,59.09) 65.71,59.13 U3100.C5 66.36,59.14 ; v1(65.71,59.09) 65.75,59.09 U3100.B5 ; U1000.E6 47.93,63.84 ; 47.93,63.84 47.61,64.16 U1000.F7 47.28,63.84 ; 47.93,63.84 U1000.F6 ; v1(69.2,62.52) 68.62,62.52 U3100.H2 ; U1000.P5 48.91,69.36 48.58,69.04 ; U1000.F9 45.98,63.84 v1(45.98,63.84) U1000.E10 ; U3100.E6 v1(65.56,60.43) 65.71,60.43 U3100.E5 ; U3100.T4 U3100.R4 ; U3100.K2 68.67,64.01 69.14,63.54 v1(69.19,63.54) ; U3100.B5 65.71,58.48 v1(65.59,58.48) 65.56,58.48 U3100.B6 ; U3100.B5 66.04,58.82 66.36,59.14 ; U3100.M5 65.39,64.66 U3100.L6 ; U3100.M5 66.43,64.91 66.44,64.91 ; U3100.M5 65.89,65.31 v1(65.56,65.63) ; 64.91,61.73 64.57,62.08 64.87,62.38 v1(64.91,62.38) 65.24,62.06 U3100.G6 ; 64.91,61.73 64.91,61.73 ; U3100.E5 66.04,60.88 v1(66.35,61.19) ; 65.89,61.41 65.53,61.77 ; 65.89,61.41 U3100.F5 66.12,61.41 v1(66.35,61.19) ; v1(64.41,65.25) 64.69,65.25 v1(65.08,65.63) ; v1(64.41,65.25) 65.01,64.66 ; v1(64.41,65.25) 64.31,65.25 v1(64.01,64.95) 64.3,64.66 65.01,64.66 ; 66.36,59.14 66.54,59.14 ; v1(48.58,65.14) U1000.H6 ; U1000.L6 48.26,67.41 U1000.M5 ; v1(65.56,65.63) 65.89,65.96 U3100.N5 ; v1(65.56,65.63) U3100.N6 65.08,65.8 v1(65.08,65.63) ; v1(65.56,65.63) U3100.M6 ; 65.53,61.77 U3100.G6 ; 64.91,61.73 U3100.G6 ; U3100.T2 68.49,67.91 v1(68.82,68.24) ; 65.01,64.66 U3100.L6 ; U1000.E10 v1(45.33,63.84) ; U1000.E10 v1(45.98,63.19) ; v1(67.16,63.03) U3100.J4 66.44,63.75 66.44,64.91 ; U3100.R4 67.24,66.85 v1(67.41,66.85) ; U3100.G3 v1(67.31,62.38) 67.16,62.38 U3100.G4 U3100.F4 66.57,61.41 v1(66.35,61.19) ; U3100.N5 66.04,65.96 v1(66.36,66.28) ; 61.05,71.03 61.19,70.89 C1202.2 61.19,70.46 ; U3100.C3 67.87,59.23 v1(67.87,59.22) 68.03,59.22 U3100.B2 ; U3100.C3 67.64,59.5 v1(67.32,59.81) ; U3100.C3 67.35,59.17 v1(67.24,59.17) 67.24,59.73 v1(67.32,59.81) ; v1(65.77,56.37) 65.32,56.37 v1(65.27,56.43) 65.39,56.55 R3101.2 ; v1(48.58,67.09) U1000.K6 U1000.J5 ; U1000.T8 U1000.T9 ; v1(65.08,65.63) 65.08,65.47 U3100.M6 ; 49.23,65.14 U1000.H5 v1(48.58,65.79) U1000.J6 48.91,66.76 U1000.K5 ; 47.28,63.84 U1000.E8 ; 47.28,63.84 46.96,64.16 U1000.F8 ; v1(64.54,58.2) 65.14,58.81 U3100.B6 ; U3100.M6 U3100.L6 ; v1(66.35,61.19) 66.77,60.76 U3100.E4 67.3,60.3 v1(67.3,60.28) 67.46,60.28 U3100.D3 67.62,60.11 v1(67.32,59.81) ; 48.58,64.49 U1000.G6 ; U1000.F3 50.21,64.16 U1000.E4 ; v1(42.73,67.74) U1000.M14 ; v1(47.93,69.04) 47.61,68.71 U1000.N7 ; U1000.G10 45.33,65.14 ; v1(47.28,67.09) U1000.K8 46.63,66.44 46.63,66.44 U1000.K9
  TOP w0.305: 66.44,65.56 66.59,65.56 66.84,65.81 U3100.N4 ; U3100.N4 66.69,65.96 v1(66.36,66.28) ; U3100.N4 66.99,65.96 U3100.P3 67.64,66.63 v1(67.41,66.85) ; v1(65.77,56.37) 65.82,56.37 65.93,56.27 67.9,56.27 68.24,56.61 R3100.2 ; U3100.H10 62.16,62.71 v1(62.47,62.39) 62.53,62.39 62.84,62.09 U3100.G9 63.18,62.41 v1(63.23,62.41) ; v1(65.63,67.65) 65.5,67.65 U3100.T6 v1(65.63,68.3) 66.02,67.91 ; v1(65.63,67.65) 66.02,67.26 U3100.R5 66.04,67.26 66.38,67.6 ; v1(65.63,67.65) U3100.R6 ; v1(65.63,67.65) 65.89,67.91 66.02,67.91 ; 66.38,67.6 66.38,67.6 66.07,67.91 66.02,67.91 ; 66.38,67.6 66.72,67.26 U3100.R4 ; U3100.K10 62.11,64.01 v1(62.45,64.35) 62.76,64.66 U3100.L9 v1(63.15,64.35) ; v1(60.12,63.6) 60.2,63.6 U3100.J12
  TOP w0.381: v1(65.39,71.79) 65.39,71.41 C3109.2 ; v1(63.42,56.17) 63.42,56.74
  TOP w0.4: 61.05,71.03 v1(60.63,71.03)
  POWER w0.35: v1(24.13,58.67) 24.13,64.47 25.15,65.48
  POWER w0.4: v1(30.84,53.8) 30.84,54.05 30.78,54.1 v1(30.78,58.67)
  S1 w0.102: v1(50.19,89.05) 50.34,89.05 ; v1(43.38,72.29) 42.72,72.95 42.72,75.74 46.08,79.1 v1(46.99,79.1)
  S1 w0.35: 28.85,70.05 28.85,74.02 v1(29.92,75.08)
  S1 w0.4: 28.85,70.05 26.92,68.12 26.92,66.29 26.11,65.48 25.15,65.48
  BOTTOM w0.08: 44.37,60.27 v1(44.28,60.27) 43.94,60.6 43.94,61.79 v1(44.03,61.88)
  BOTTOM w0.102: 36.53,87.88 36.53,77.26 40.78,73 v1(40.78,72.29) ; v1(38.18,74.24) 37.42,74.24 35.81,75.84 35.81,76.25 35.51,76.56 35.51,87.48 ; 53.38,71.27 53.65,71.17 v1(56.24,71.12) ; v1(67.16,63.03) 67.17,63.04 67.17,63.41 67.3,63.54 67.36,63.47 69.1,63.47 69.16,63.54 v1(69.19,63.54) 69.2,63.54 v1(69.71,62.97) ; v1(48.58,68.39) 48.58,69.11 49.28,69.8 50.5,69.8 50.75,70.05 52.07,70.05 v1(52.35,70.33)
  BOTTOM w0.127: v1(44.03,62.53) v1(44.03,61.88) ; 69.84,66.08 68.82,67.09 68.59,67.09 68.08,67.6 v1(68.06,67.6) ; v1(44.18,58.46) 44.18,60.08 44.37,60.27
  BOTTOM w0.2: 31.43,79.89 v1(31.45,79.91)
  BOTTOM w0.203: C1014.2 42.18,68.89 41.35,69.72 41.35,69.88 ; v1(40.78,70.99) 40.78,70.7 40.74,70.66 ; v1(42.73,70.34) 42.85,70.45 C1603.2 42.85,70.69 ; 50.11,77.06 50.11,78.64 v1(50.1,78.66)
  BOTTOM w0.254: v1(65.77,56.37) 66.17,56.77 C3113.2 ; v1(48.58,62.54) 48.44,62.68 48.44,63.02 ; v1(65.27,56.43) 65.23,56.46 C3112.2 ; 48.46,63.19 v1(47.93,63.19) ; v1(57.65,69.89) 57.05,70.48 C3128.2
  BOTTOM w0.3: 69.24,68.43 69.02,68.43 68.95,68.36 ; v1(38.18,60.59) 35.26,57.66 29.82,57.66 26.99,54.83
  BOTTOM w0.305: v1(64.06,68.2) 64.4,67.86 65.02,68.01 ; C3103.2 60.12,63.39 v1(60.12,63.6) ; C3107.2 53.45,60.05 53.84,59.66 v1(53.84,59.47) ; C3106.2 C3126.2 67.55,66.21 67.41,66.34 v1(67.41,66.85) ; C3104.2 65.65,68.32 v1(65.63,68.3) ; v1(51.87,57.57) 52.55,57.57 C3108.2 ; v1(58.73,59.22) 58.79,59.28 C3122.2 59.55,59.59 v1(59.55,59.73) ; 48.46,63.19 48.46,64.31 48.58,64.43 ; v1(67.16,63.03) 66.63,63.03 66.62,63.02 ; v1(54.41,65.32) 54.98,65.32 C3102.2 ; v1(65.71,59.09) 65.07,59.09 ; C3131.2 54.09,68.98 v1(54.09,69.13) ; C3130.2 58.85,66.14 v1(58.98,66.01) ; C3117.2 65.18,60.74 R3106.2 ; v1(68.82,68.24) 68.95,68.36
  BOTTOM w0.35: v1(30.78,58.67) v1(24.13,58.67) ; v1(29.92,75.08) 31.46,75.08 31.5,75.1 ; v1(30.84,52.22) v1(30.84,53.8)
  BOTTOM w0.381: 65.14,59.09 64.78,58.73 C3105.2 ; 69.84,66.08 v1(69.84,64.68) 69.84,64.49 v1(70.6,63.73) 71.36,62.97 v1(71.36,62.52) v1(71.36,60.49) v1(70.03,59.16) v1(70.03,57.63) ; 65.77,63.02 66.66,63.02 ; 69.24,68.43 69.79,68.43 70.6,67.63 v1(70.6,66.59) 70.6,65.89 v1(71.49,65) 72.5,63.98 v1(72.5,60.11) v1(71.36,58.97) 71.23,58.84 v1(71.23,57.31) ; v1(69.71,62.97) 70.22,62.52 v1(70.22,60.87) v1(68.89,59.54) 68.89,57.95 v1(68.5,57.57) ; 48.58,64.43 v1(48.58,64.49) v1(48.58,65.14) v1(48.58,65.79) v1(48.58,67.09)
  BOTTOM w0.4: 31.43,77.98 31.43,79.89
  BOTTOM w0.5: 31.5,75.1 31.43,75.16 31.43,77.98
  vias: v1(12.65,34.75) v1(12.9,35.56) v1(13.21,25.76) v1(13.21,24.49) v1(16.38,28.6) v1(17.58,31.34) v1(17.58,30.84) v1(18.08,31.34) v1(18.08,30.84) v1(18.49,23.93) v1(18.49,23.42) v1(18.49,22.61) v1(18.49,22.1) v1(18.59,31.34) v1(18.59,30.84) v1(20.22,49.12) v1(20.37,54.91) v1(20.37,52.73) v1(20.57,83.82) v1(20.68,49.99) v1(20.78,72.75) v1(20.88,48.41) v1(21.59,49.12) v1(22.2,46.89) v1(22.35,83.57) v1(22.35,81.13) v1(22.3,48.41) v1(23.11,81.84) v1(23.27,31.7) v1(23.62,83.57) v1(23.67,54.91) v1(23.67,52.73) v1(23.67,31.95) v1(23.93,80.62) v1(23.98,72.44) v1(24.99,67.51) v1(25.4,44.04) v1(25.81,28.5) v1(26.42,56.44) v1(26.42,29.72) v1(26.87,44.55) v1(27.23,63.8) v1(28.24,30.02) v1(28.55,49.02) v1(28.55,48.51) v1(28.55,48.01) v1(28.55,47.5) v1(28.75,77.47) v1(29.31,67.51) v1(29.26,63.8) v1(29.36,54.36) v1(29.57,61.42) v1(29.67,77.47) v1(29.67,59.79) v1(29.77,81.58) v1(29.77,29.82) v1(29.92,66.9) v1(29.97,54.1) v1(29.97,30.33) v1(30.12,75.59) v1(30.13,61.91) v1(30.23,63.5) v1(30.53,22.71) v1(30.85,62.65) v1(30.94,22.45) v1(31.06,30.1) v1(31.24,71.27) v1(31.45,29.72) v1(31.6,54.31) v1(32.11,54.31) v1(32.36,75.95) v1(32.36,74.42) v1(32.36,73.61) v1(32.51,84.38) v1(32.46,49.83) v1(32.61,54.31) v1(32.82,51.61) v1(32.87,74.93) v1(33.32,51.61) v1(33.58,49.73) v1(33.78,74.93) v1(33.78,66.8) v1(33.88,64.57) v1(34.19,67.41) v1(34.75,54.61) v1(34.75,51.97) v1(34.75,23.83) v1(34.8,23.32) v1(34.8,22.81) v1(34.95,76.05) v1(34.9,74.73) v1(35.15,69.34) v1(35.1,52.37) v1(35.31,56.64) v1(35.46,52.78) v1(35.86,69.65) v1(35.87,62.2) v1(35.97,55.42) v1(36.22,68.07) v1(36.18,63.52) v1(36.53,70.05) v1(36.54,60.57) v1(37.41,56.87) v1(38.35,54.81) v1(38.51,78.05) v1(38.71,55.22) v1(38.86,58.32) v1(39.52,27.89) v1(39.47,26.57) v1(39.52,24.64) v1(39.52,24.13) v1(39.62,34.95) v1(39.78,59.23) v1(40.03,27.89) v1(39.98,26.57) v1(39.98,25.15) v1(39.98,24.64) v1(39.98,24.13) v1(40.54,56.59) v1(40.54,27.89) v1(41.25,90.07) v1(41.25,84.38) v1(41.25,83.72) v1(41.25,83.21) v1(41.4,78.38) v1(41.4,77.88) v1(41.5,21.13) v1(42.08,65.79) v1(42.37,42.32) v1(42.77,20.47) v1(43.28,20.47) v1(43.38,68.25) v1(43.38,67.74) v1(43.79,20.47) v1(44.03,67.74) v1(44.15,50.81) v1(44.22,55.89) v1(44.18,53.66) v1(44.25,38.1) v1(44.3,46.28) v1(44.35,44.3) v1(44.45,41.66) v1(44.6,84.38) v1(44.6,78.99) v1(44.79,59.16) v1(44.95,49) v1(45.06,64.47) v1(45.21,89.66) v1(45.31,37.69) v1(45.52,46.28) v1(45.62,89.36) v1(45.87,57.79) v1(45.87,44.3) v1(46.53,47.41) v1(46.53,41.71) v1(46.63,63.84) v1(46.63,37.19) v1(47.01,59.89) v1(47.14,37.19) v1(47.39,56.27) v1(47.55,44.3) v1(48.12,45.82) v1(48.63,55) v1(48.92,42.82) v1(49.17,89.76) v1(49.48,81.99) v1(49.64,44.3) v1(49.9,53.73) v1(50.19,41.61) v1(50.34,59.09) v1(50.81,78.63) v1(51.16,82.96) v1(51.3,42.58) v1(51.52,78.63) v1(51.64,51.98) v1(51.71,38.96) v1(51.92,82.96) v1(51.88,80.18) v1(52.22,38.96) v1(52.78,74.78) v1(52.94,78.35) v1(53.07,41.82) v1(53.34,90.47) v1(53.31,71.3) v1(53.65,78.37) v1(53.58,56.93) v1(53.61,51.98) v1(53.7,82.88) v1(53.76,79.72) v1(54.1,73.91) v1(54.66,70.92) v1(55.02,71.32) v1(55.04,57.7) v1(55.11,41.82) v1(55.23,62.39) v1(55.25,35.84) v1(55.47,71.12) v1(55.52,37.01) v1(55.7,37.49) v1(55.73,35.81) v1(55.77,51.98) v1(55.88,34.59) v1(56.03,72.09) v1(56.03,37.01) v1(56.08,21.44) v1(56.18,72.85) v1(56.24,37.47) v1(56.39,34.59) v1(56.39,15.9) v1(56.54,37.01) v1(56.63,60.68) v1(56.9,34.59) v1(57.14,41.82) v1(57.1,29.49) v1(57.51,74.37) v1(57.58,18.54) v1(57.93,51.98) v1(58.01,28.09) v1(58.06,20.68) v1(58.22,75.95) v1(58.22,71.37) v1(58.22,70.65) v1(58.52,34.14) v1(58.65,37.24) v1(58.72,71.37) v1(58.83,26.87) v1(58.83,25.76) v1(58.93,24.33) v1(59.28,72.69) v1(59.41,31.67) v1(59.54,33.4) v1(59.61,41.82) v1(59.64,37.9) v1(59.74,16) v1(59.84,72.69) v1(59.87,28.63) v1(59.89,17.07) v1(60.34,51.98) v1(60.66,24.89) v1(60.81,75.08) v1(61.67,74.37) v1(61.93,72.49) v1(61.9,41.82) v1(61.93,37.87) v1(62.43,72.49) v1(62.54,71.03) v1(62.64,14.78) v1(62.76,51.98) v1(63.3,23.32) v1(63.5,26.16) v1(63.75,32) v1(63.86,14.99) v1(64.03,33.38) v1(64.06,67.59) v1(64.06,25.3) v1(64.44,41.82) v1(64.54,68.5) v1(64.62,74.93) v1(64.67,29.16) v1(64.92,51.98) v1(65.18,74.93) v1(65.18,29.16) v1(65.68,74.93) v1(65.84,42.06) v1(65.84,33.38) v1(66.04,72.03) v1(66.6,74.93) v1(66.95,14.48) v1(67.01,31.95) v1(67.16,71.93) v1(67.13,71.4) v1(67.33,51.98) v1(67.56,74.93) v1(68.28,35.61) v1(68.54,74.92) v1(68.58,78.38) v1(68.78,39.37) v1(68.78,35.61) v1(69.33,51.98) v1(69.39,74.93) v1(69.7,38.86) v1(70.09,68.3) v1(70.21,78.44) v1(70.47,53) v1(70.46,45.16) v1(70.6,55.28) v1(71.02,35.41) v1(71.25,71.93) v1(71.17,55.92) v1(71.37,46.08) v1(71.53,35.41) v1(71.75,71.36) v1(71.96,56.74) v1(72.12,65.82) v1(72.44,47.19) v1(72.76,64.11) v1(72.76,62.27) v1(72.7,53.31) v1(73.66,35.46) v1(74.03,61.06) v1(74.16,58.46) v1(74.16,56.81) v1(74.16,55.03) v1(74.78,73.86) v1(74.83,35.41) v1(75.39,35.46) v1(75.95,73.81) v1(76.76,72.09) v1(76.91,70.46) v1(77.11,67.51) v1(77.37,66.24) v1(78.54,70.46) v1(79.86,66.75) v1(80.52,66.4) v1(83.41,77.06)
VCC1V8_DDR: length 61.3
  TOP w0.08: 67.62,69.28 67.64,69.26
  TOP w0.254: 65.66,68.9 65.58,68.9 U3100.U6
  TOP w0.3: 62.04,57.76 62.04,56.99 62.54,56.49 v1(62.6,56.49)
  TOP w0.305: U3100.A6 65.57,57.82 v1(65.71,57.82) 66.04,58.15 U3100.A5 ; 67.64,69.26 U3100.U3 67.61,68.56 66.85,69.32 ; U3100.A3 67.64,58.16 v1(67.87,58.39) ; 65.27,69.29 65.27,68.59 U3100.U6 ; 65.27,69.29 65.66,68.9 65.7,68.9 U3100.U5 66.04,68.56 66.43,68.96 66.84,68.56 U3100.U4 66.9,68.56 67.62,69.28 v1(67.62,69.51) 67.62,70 ; 65.27,69.29 65.27,70.01 65.14,70.01 64.66,70.49 64.66,71.48 64.34,71.79 62.34,71.79 62.04,71.49 U3100.U10 ; v1(66.85,57.82) 66.85,58.14 U3100.A4 ; U3100.A10 62.04,58.16 62.04,57.76
  TOP w0.381: 66.43,68.96 66.43,70.01
  TOP w0.508: 65.27,70.01 67.6,70.01 67.62,70
  POWER w0.508: v1(67.87,58.39) 72.63,58.39 74.16,59.93 v1(74.66,59.92)
  BOTTOM w0.305: C3112.1 65.12,57.8 64.62,57.3 63.41,57.3 v1(62.6,56.49)
  BOTTOM w0.381: C3112.1 65.25,57.82 v1(65.71,57.82) 66.19,57.82 ; 66.19,57.82 C3113.1 ; 66.19,57.82 v1(66.85,57.82) 67.3,57.82 v1(67.87,58.39)
  BOTTOM w0.4: 61.11,77.37 62.79,75.69 62.79,73.81 62.59,73.61 ; v1(74.66,59.92) 74.68,59.91
  BOTTOM w0.508: 74.68,59.91 74.68,64.67 69.84,69.51 v1(67.62,69.51) 66.84,69.51 62.74,73.61 62.74,73.66 62.69,73.61 62.59,73.61
VCC_0V8: length 0.7
  TOP w0.127: 48.58,70.34 v1(48.58,70.34)
  TOP w0.2: U1000.R6 48.58,70.34
  BOTTOM w0.203: 48.76,70.16 C1402.1 48.59,70.34 v1(48.58,70.34)
VCC_1V8: length 18.7
  TOP w0.2: U1000.R7 v1(47.93,69.69) ; v1(44.68,70.34) U1000.T12
  S1 w0.08: 48.88,70.66 48.41,70.66 48.26,70.52 48.26,70.03 ; 48.87,71.31 48.25,71.31 48.25,71.22 48.25,70.81 48.11,70.66 47.76,70.66 47.61,70.51 47.61,69.99
  S1 w0.102: 47.61,69.99 v1(47.93,69.69) 48.26,70.03 ; 48.87,71.31 48.97,71.21 48.97,70.75 48.88,70.66
  BOTTOM w0.2: v1(44.68,70.34) 44.09,70.93 44.09,73.61 41.86,75.84 41.86,80.61 41.35,81.11
  BOTTOM w0.203: v1(47.93,69.69) 47.99,69.69 47.75,69.47
VCC_3V3: length 48.7
  TOP w0.4: v1(74.93,33.38) R1301.2
  POWER w0.4: v1(68.43,37.03) 71.27,37.03 v1(74.93,33.38)
  S1 w0.5: 47.29,35.56 v1(46.76,35.56) 46.02,35.56 45.11,36.47 30.99,36.47
  S1 w0.635: v1(68.43,37.03) 65.97,39.22 53.44,39.22 52.17,37.95 49.73,37.95 47.29,35.56
  vias: v1(67.41,37.03) v1(67.92,37.03)
VCC_DDR: length 69.7
  TOP w0.152: U3100.H12 U3100.H11
  TOP w0.2: v1(47.28,65.13) U1000.G8 v1(46.63,64.81) U1000.G9 ; v1(47.28,65.14) U1000.G7 ; v1(47.28,65.14) U1000.H8 47.61,66.11 U1000.J7 ; v1(47.28,66.44) U1000.K7 v1(47.93,67.09) U1000.L7
  TOP w0.203: U1000.G8 47.28,64.49 v1(47.28,64.49) ; v1(68.89,65.57) 68.7,65.57 U3100.M2
  TOP w0.254: 61.77,63.09 62.04,63.36 ; 61.77,63.09 U3100.J10 ; 61.77,63.09 61.39,62.71 U3100.H11 ; v1(61.2,68.94) 61.24,68.9 U3100.U11 ; 61.11,63.88 U3100.K11 61.11,63.88 ; 61.11,63.88 60.89,63.66 v1(60.83,63.66) 60.78,63.66 U3100.K12 60.12,64.32 60.1,64.32 60.32,64.54 U3100.L12 ; v1(68.95,62.01) 68.48,62.01 U3100.G2 68.29,62.06 U3100.H3 ; U3100.J6 65.89,62.71 U3100.H5 ; U3100.J6 U3100.J5 ; U3100.J6 65.24,63.19 v1(65.08,63.03) 65.08,62.87 U3100.H6 65.56,62.38 v1(65.71,62.38) ; U3100.J6 U3100.K6 65.58,64.01 65.58,64.05 66,64.05 66.04,64.01 U3100.K5 ; v1(47.28,65.79) U1000.J7 v1(47.28,66.44) ; v1(63.23,62.97) 63.38,62.97 U3100.H8 ; U3100.N12 60.11,65.96 v1(60.07,66) ; U3100.R12 58.81,67.26 v1(58.66,67.41) ; U3100.L5 U3100.K5 ; U3100.K5 U3100.J5 ; U3100.P4 66.69,66.61 v1(66.36,66.93) 66.04,66.61 U3100.P5 ; v1(47.28,64.49) U1000.G7 ; v1(68.95,61.51) 68.53,61.51 U3100.F2 ; U3100.P5 65.82,66.4 v1(65.63,66.4) ; U3100.P5 65.74,66.9 v1(65.63,66.9) ; v1(65.71,62.38) U3100.H5 ; v1(65.71,62.38) U3100.G5 ; U3100.E8 63.48,60.6 63.48,60.6 v1(63.23,60.36) ; U3100.H5 U3100.J5 ; v1(68.95,64.81) 68.8,64.66 68.44,64.66 U3100.L2 ; v1(64.57,65.86) 63.73,65.86 U3100.N8 64.21,66.53 v1(64.21,66.98)
  TOP w0.305: U3100.A11 61.24,57.92 v1(61.03,57.72) ; U3100.D5 66.24,60.31 v1(66.47,60.31) 66.64,60.31 U3100.D4 v1(66.51,59.78) 66.36,59.78 U3100.D5 ; U3100.D5 65.82,59.89 65.45,59.89 U3100.D6 ; v1(61.2,68.94) 61.2,69.94 C1202.1 ; 62.04,63.36 62.09,63.41 v1(62.47,63.41) 62.52,63.36 U3100.J9 ; U3100.A8 63.64,57.85 v1(63.61,57.82) 63.61,57.82 v1(62.86,57.82) ; v1(60.07,62.09) 60.1,62.06 U3100.G12 ; U3100.U8 64,68.92 64,70 C3123.1 63.91,70.01 63.91,70.01 v1(63.52,70.01) 63.51,70.01 C3127.1 62.84,69.73 U3100.U9 ; 65.26,66.58 65.31,66.58 v1(65.63,66.9) ; 65.26,66.58 65.45,66.4 ; 65.26,66.58 U3100.P6 ; U3100.H9 63.1,62.97 v1(63.23,62.97) 62.84,63.36 U3100.J9 ; 65.58,64.01 v1(65.39,63.66) ; U3100.K8 63.49,64.01 U3100.J9 ; v1(62.86,57.82) 62.84,57.85 U3100.A9 ; v1(62.86,57.82) 62.86,57.11 C1200.1 ; v1(59.42,63.66) 60.07,64.31 v1(60.07,64.32) 60.1,64.32 ; U3100.K11 v1(61.52,63.73) 61.89,63.36 U3100.J10 ; v1(60.12,59.73) 60.17,59.73 U3100.C12 ; U3100.E12 60.08,60.76 v1(60.07,60.77)
  TOP w0.381: 64.57,66.62 65.22,66.62 U3100.P6 ; 64.57,66.62 v1(64.21,66.98) ; 64.57,66.62 v1(64.57,65.86)
  BOTTOM w0.102: v1(64.41,66.4) 64.41,66.49 64.62,66.49 ; 63.93,66.42 63.95,66.4 64.01,66.4
  BOTTOM w0.203: v1(64.41,66.4) 64.01,66.4 ; 63.93,66.42 C3121.1
  BOTTOM w0.254: v1(63.23,60.36) 63.54,60.36 63.91,59.99 C3105.1 ; 64.54,66.41 64.54,66.42 64.62,66.49 ; 64.54,66.41 64.49,66.46 ; 64.54,66.41 64.57,66.38 v1(64.57,65.86)
  BOTTOM w0.3: 68.89,67.6 68.94,67.55 C3125.1 ; v1(66.51,59.78) 66.47,59.83 v1(66.47,60.31)
  BOTTOM w0.305: v1(63.61,57.82) 63.63,57.81 C1201.1 ; v1(59.42,63.66) 59.39,63.63 C3103.1 ; v1(64.21,66.98) 64.73,66.46 65.02,66.61 64.62,66.49 64.49,66.46 v1(64.41,66.4) ; v1(68.95,61.51) 69.26,61.2 C3132.1 ; C3101.1 65.3,66.92 65.4,66.92 v1(65.63,66.9) ; 64.63,62.96 65.01,62.96 v1(65.08,63.03) ; C3130.1 59.72,66 v1(60.07,66) ; C3126.1 68.89,65.6 v1(68.89,65.57) 68.73,65.41 68.73,65.41 C3106.1 68.63,65.13 v1(68.95,64.81) ; C3122.1 60.14,59.71 v1(60.12,59.73) ; C3129.1 53.31,70.23 v1(52.86,70.23) ; C3131.1 55.36,68.87 55.36,68.87 v1(55.36,69.13) ; C3104.1 66.22,67.42 66.22,67.08 v1(66.36,66.93) ; v1(55.17,64.43) 55.51,64.43 C3102.1 ; C3124.1 65.53,63.66 v1(65.39,63.66) ; 68.89,67.6 v1(68.89,67.6) ; C3107.1 54.35,59.48 v1(54.34,59.47) ; C3128.1 57.54,71.39 v1(57.56,71.37) ; R3104.1 C3114.1 66.93,60.77 v1(66.47,60.31) ; v1(53.96,57.57) 53.47,57.57 C3108.1
  BOTTOM w0.381: 64.01,66.61 65.02,66.61 ; 64.01,66.61 63.97,66.61 63.91,66.67 ; 64.01,66.61 64.01,66.4 ; C3120.1 66.51,59.13 v1(66.51,59.78) ; 63.91,66.67 C3121.1 ; 63.91,66.67 v1(64.21,66.98)
  vias: v1(56.08,17.83) v1(56.08,17.32) v1(56.54,18.08) v1(56.54,17.17) v1(56.69,17.63) v1(64.47,69.98)
VCCIO_FLASH: length 6.8
  TOP w0.127: 48.58,69.68 v1(48.58,69.69)
  TOP w0.2: U1000.P6 48.58,69.68
  S1 w0.3: v1(53.7,71.68) 53.54,71.83 52.8,71.83 50.87,69.9 48.8,69.9 v1(48.58,69.69)
  BOTTOM w0.203: 48.39,69.47 48.58,69.66 v1(48.58,69.69)
VCCIO_SD: length 7.5
  TOP w0.2: v1(43.38,70.34) U1000.T13
  BOTTOM w0.2: 41.25,76.12 C1300.1 41.25,75.84 43.79,73.3 43.79,70.74 v1(43.38,70.34)
VDD_ARM: length 5.3
  TOP w0.2: U1000.N12 v1(44.03,69.04) U1000.P13 v1(44.07,69.65) U1000.P12
  TOP w0.203: U1000.P12 v1(44.03,69.04) ; U1000.N12 v1(44.03,68.39)
  BOTTOM w0.254: v1(44.03,68.39) 44.05,68.4 44.91,68.4
  BOTTOM w0.3: C1014.1 43.56,68.89 ; C1015.1 43.66,69.69 v1(44.07,69.65)
  BOTTOM w0.305: v1(44.03,68.39) 44.03,69.01 43.91,68.89 43.56,68.89
  vias: v1(18.64,25.86) v1(18.64,25.35) v1(18.64,24.84) v1(18.8,26.37) v1(19.3,26.37) v1(19.81,26.37) v1(24.38,32.97) v1(24.64,33.38) v1(24.69,33.88) v1(24.89,32.97) v1(25.2,33.88) v1(25.2,33.38) v1(28.96,52.63) v1(28.96,52.12) v1(28.96,51.61) v1(29.46,52.63) v1(29.46,52.12) v1(29.46,51.61) v1(29.97,52.63) v1(29.97,52.12) v1(43.38,69.69) v1(44.6,68.45)
VDD_LOGIC: length 9.2
  TOP w0.2: v1(42.73,64.49) v1(43.38,65.14) U1000.H13 43.55,65.62 43.55,65.95 U1000.J13 ; U1000.J9 v1(45.98,65.79) U1000.H9 v1(45.98,65.14) ; U1000.L10 v1(45.42,67.64) U1000.M11
  BOTTOM w0.102: v1(43.38,65.14) 43.38,65.13
  BOTTOM w0.203: v1(42.73,64.49) 42.76,64.49 42.76,64.55 43.16,64.95 ; 43.16,64.95 43.23,64.84 ; 43.16,64.95 43.33,65.13 43.37,65.13 43.38,65.13
  BOTTOM w0.3: 46.1,65.43 45.98,65.43 v1(45.98,65.79) ; v1(45.98,65.14) 45.67,64.82 C1009.1 45.67,64.41 ; C1010.1 45.76,67.31 v1(45.42,67.64) ; v1(42.73,64.49) 42.34,64.49 C1011.1
  BOTTOM w0.381: 46.1,65.43 46.1,64.97 45.67,64.54
  vias: v1(42.21,48.11) v1(42.21,47.6) v1(42.67,48.41) v1(42.67,47.9) v1(42.93,47.5) v1(43.18,48.92) v1(43.18,48.41) v1(43.18,47.9) v1(43.49,22.7) v1(43.48,22.2) v1(44,22.7) v1(43.99,22.2) v1(44.5,22.71) v1(44.5,22.2)
VDD_NPU: length 14
  TOP w0.102: 45.33,66.44 v1(45.29,66.42) ; 45.33,65.79 v1(45.31,65.79)
  TOP w0.2: v1(44.68,65.79) U1000.H12 v1(44.03,65.14) ; v1(44.68,65.79) U1000.H11 ; v1(44.68,65.79) U1000.J11 ; U1000.J11 v1(44.68,66.44) U1000.K11 45.33,66.44 ; U1000.J11 v1(45.29,66.42) ; U1000.J11 45.33,66.44 ; U1000.J11 45.33,65.79 ; 45.33,66.44 U1000.K10 v1(45.29,66.42) ; U1000.H11 v1(45.31,65.79) ; U1000.H11 v1(45.31,65.79) ; v1(45.29,66.42) U1000.J10 v1(45.31,65.79)
  TOP w0.254: U1000.H12 v1(44.03,65.79)
  POWER w0.381: v1(45.31,65.79) 44.44,65.79 44.03,65.38 v1(44.03,65.79)
  BOTTOM w0.15: 43.66,66.37 C1006.1
  BOTTOM w0.203: 43.61,66.55 43.61,66.7 43.97,67.06 43.97,67.26 43.99,67.28
  BOTTOM w0.3: 43.89,64.84 C1001.1 43.89,65.63 ; v1(44.03,65.79) 44.03,65.84 ; v1(44.68,65.79) 44.53,65.63 43.89,65.63 ; 43.89,65.63 43.61,66.55
  vias: v1(21.59,24.66) v1(22.1,25.5) v1(22.1,24.79) v1(22.45,25.86) v1(22.45,25.15) v1(22.45,24.43) v1(31.24,49.12) v1(31.24,48.62) v1(31.24,48.11) v1(31.75,49.12) v1(31.75,48.62) v1(31.75,48.11) v1(32.26,49.12) v1(32.26,48.62)
VDD_VEPU: length 5.6
  TOP w0.2: U1000.M9 46.14,67.89 v1(46.14,67.75) 46.14,67.69 46.36,67.47 ; U1000.M9 U1000.N8 46.71,68.96 v1(46.56,68.96) U1000.N9 ; U1000.M9 v1(46.63,67.74) 46.36,67.47 ; 46.36,67.47 U1000.L9 46.47,67.25 v1(46.63,67.25)
  POWER w0.35: v1(46.56,68.96) v1(46.63,67.25)
  vias: v1(20.32,33.38) v1(20.32,32.87) v1(20.32,32.36) v1(20.65,33.78) v1(20.83,32.87) v1(20.96,33.38) v1(21.64,56.13) v1(21.64,55.63) v1(22.15,56.13) v1(22.15,55.63) v1(22.66,56.13) v1(22.66,55.63)
